# Altium PCB ProPrj_HTXStudio_OneHanded_Keyboard(1).PcbDoc (part 1 of 11)
Units mm, origin at the board's own origin, x right, y up, seen from the top; angles counter-clockwise.
Board outline 152.4 x 101.6 mm, 20 copper layers (F.Cu, F.Mask, B.Cu, B.Mask, In1.Cu, F.SilkS, In2.Cu, B.SilkS, F.Adhes, B.Adhes, F.Paste, B.Paste, Dwgs.User, Cmts.User, Eco1.User, Eco2.User, Edge.Cuts, Margin, B.CrtYd, F.CrtYd); 269 components, 0 nets, 747 pads, 1168 vias.
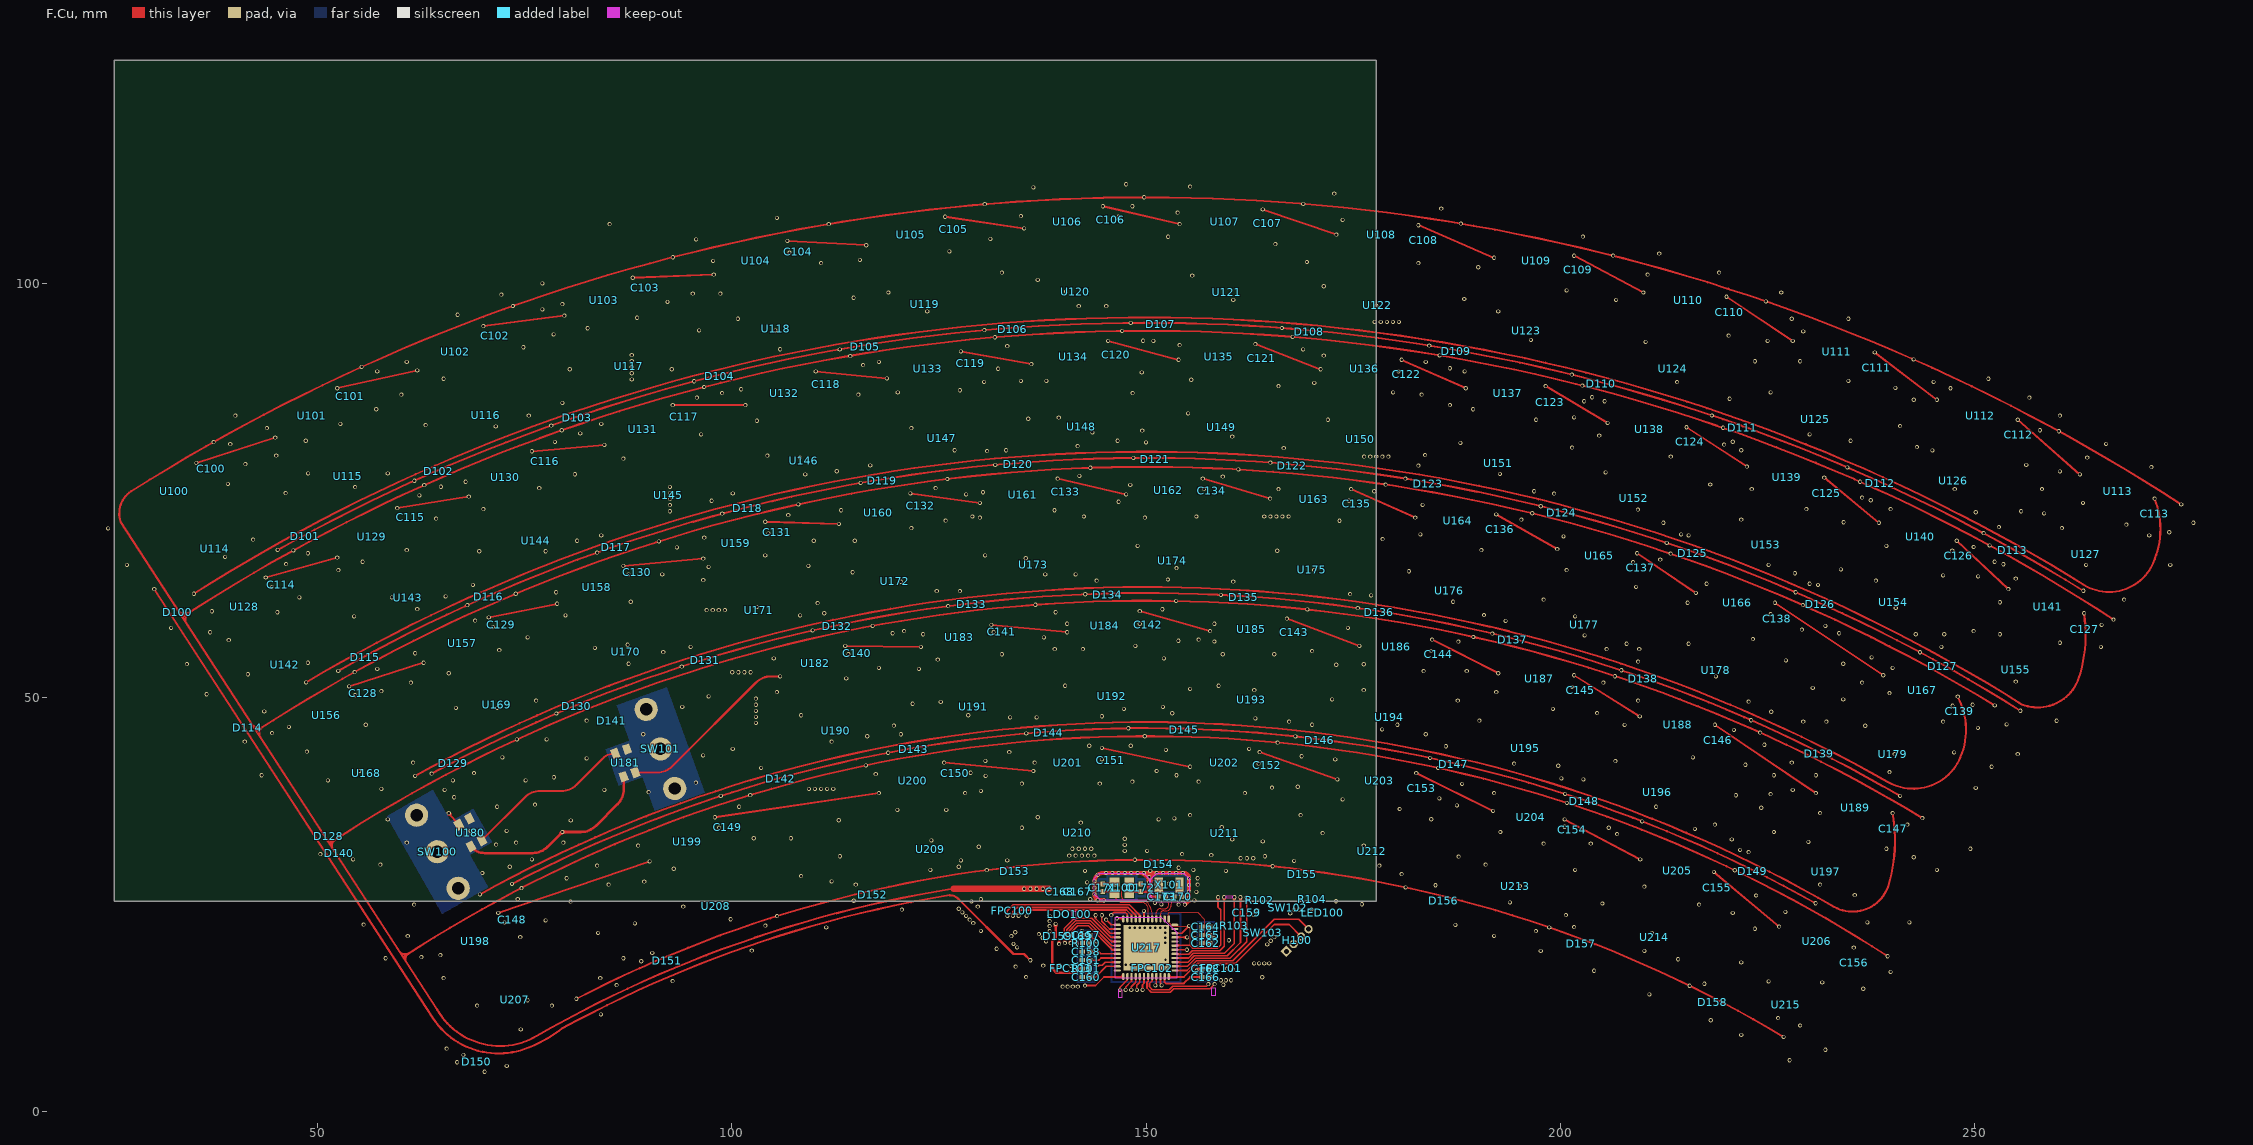
[diagram p0: F.Cu view]
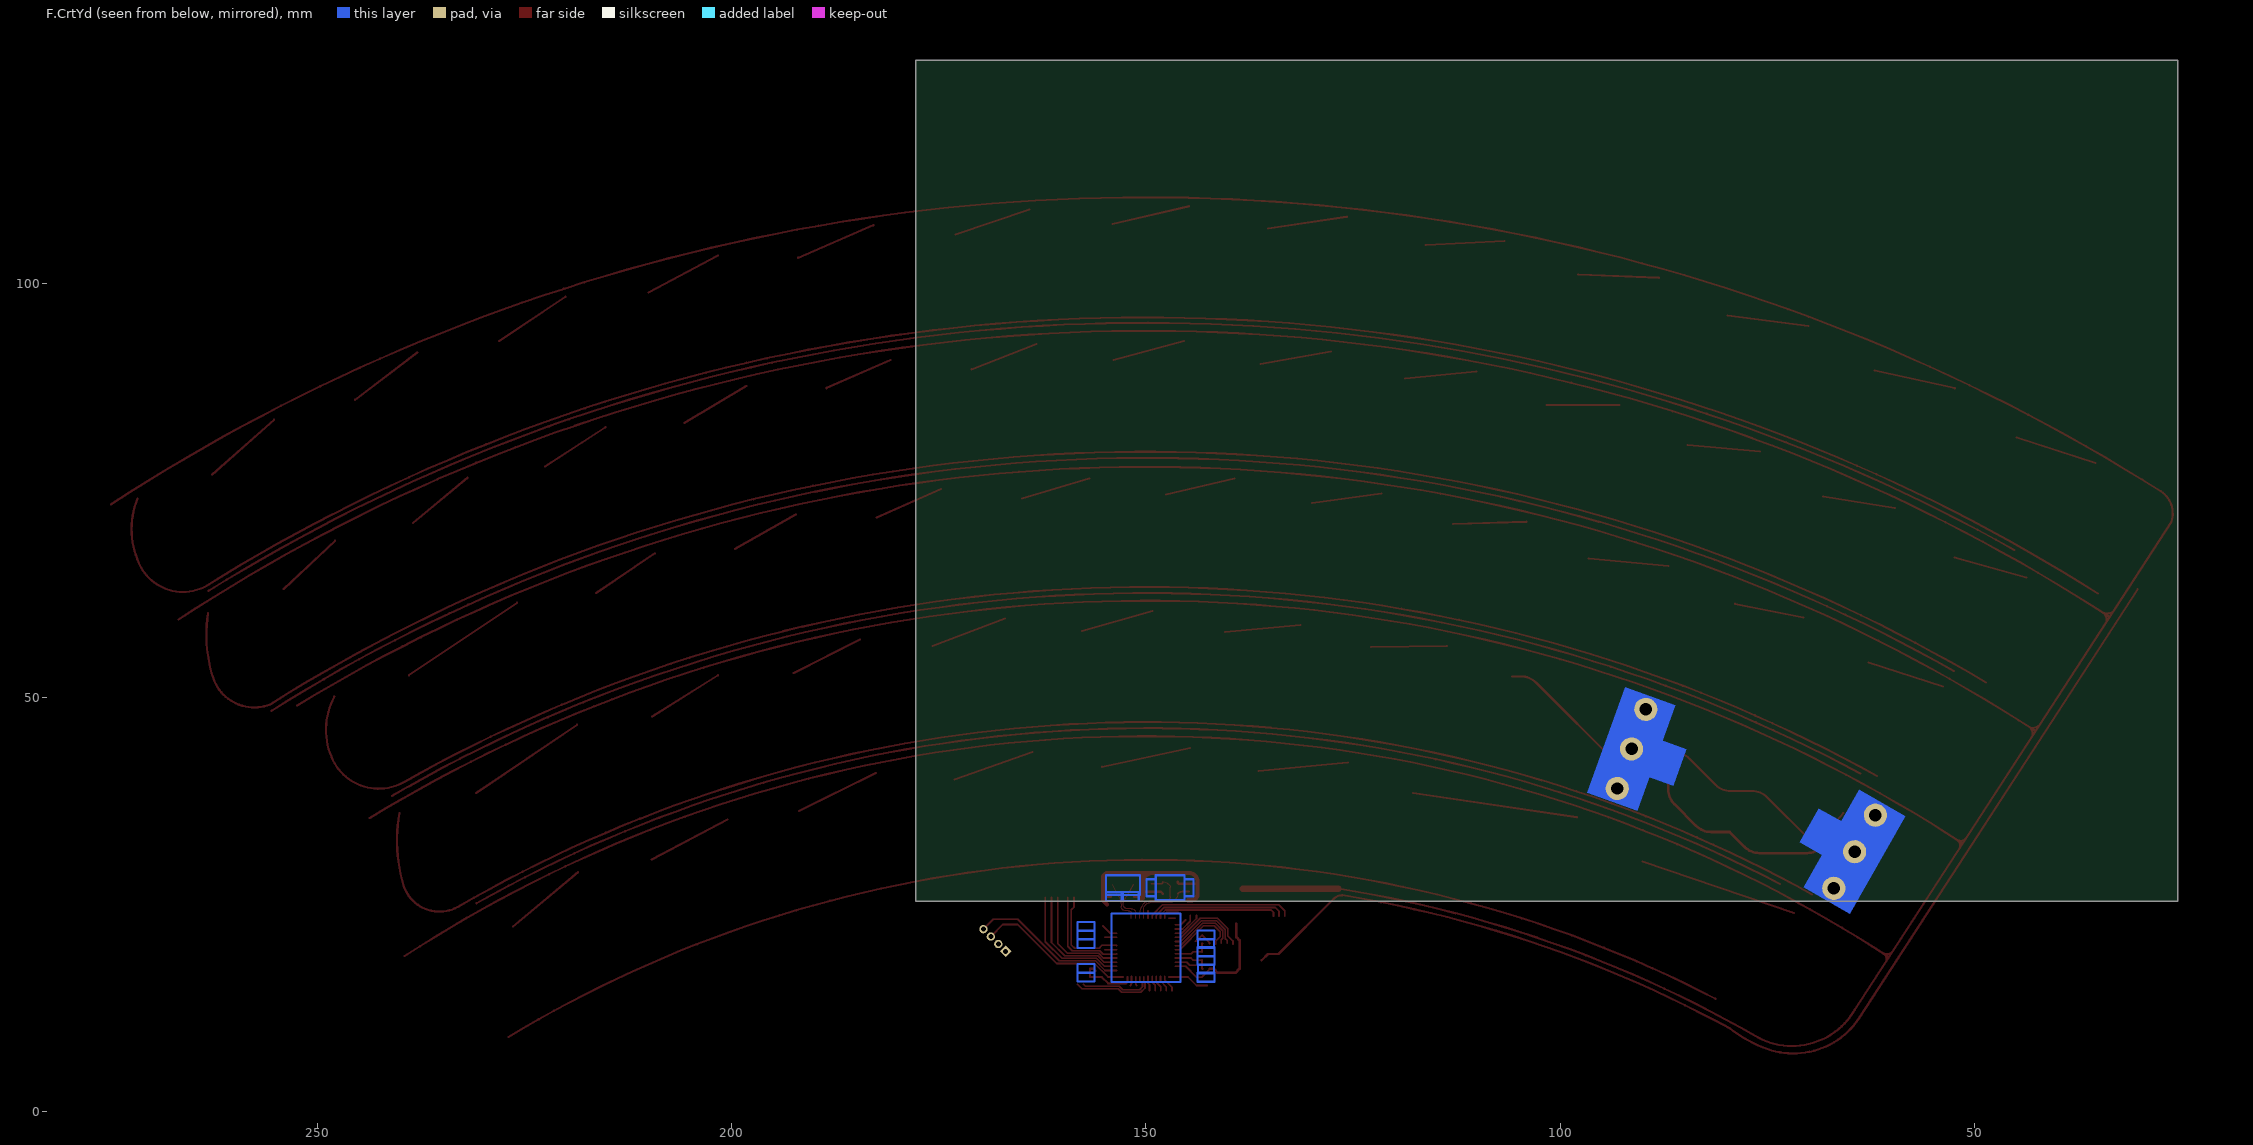
[diagram p1: F.CrtYd view, seen from below]
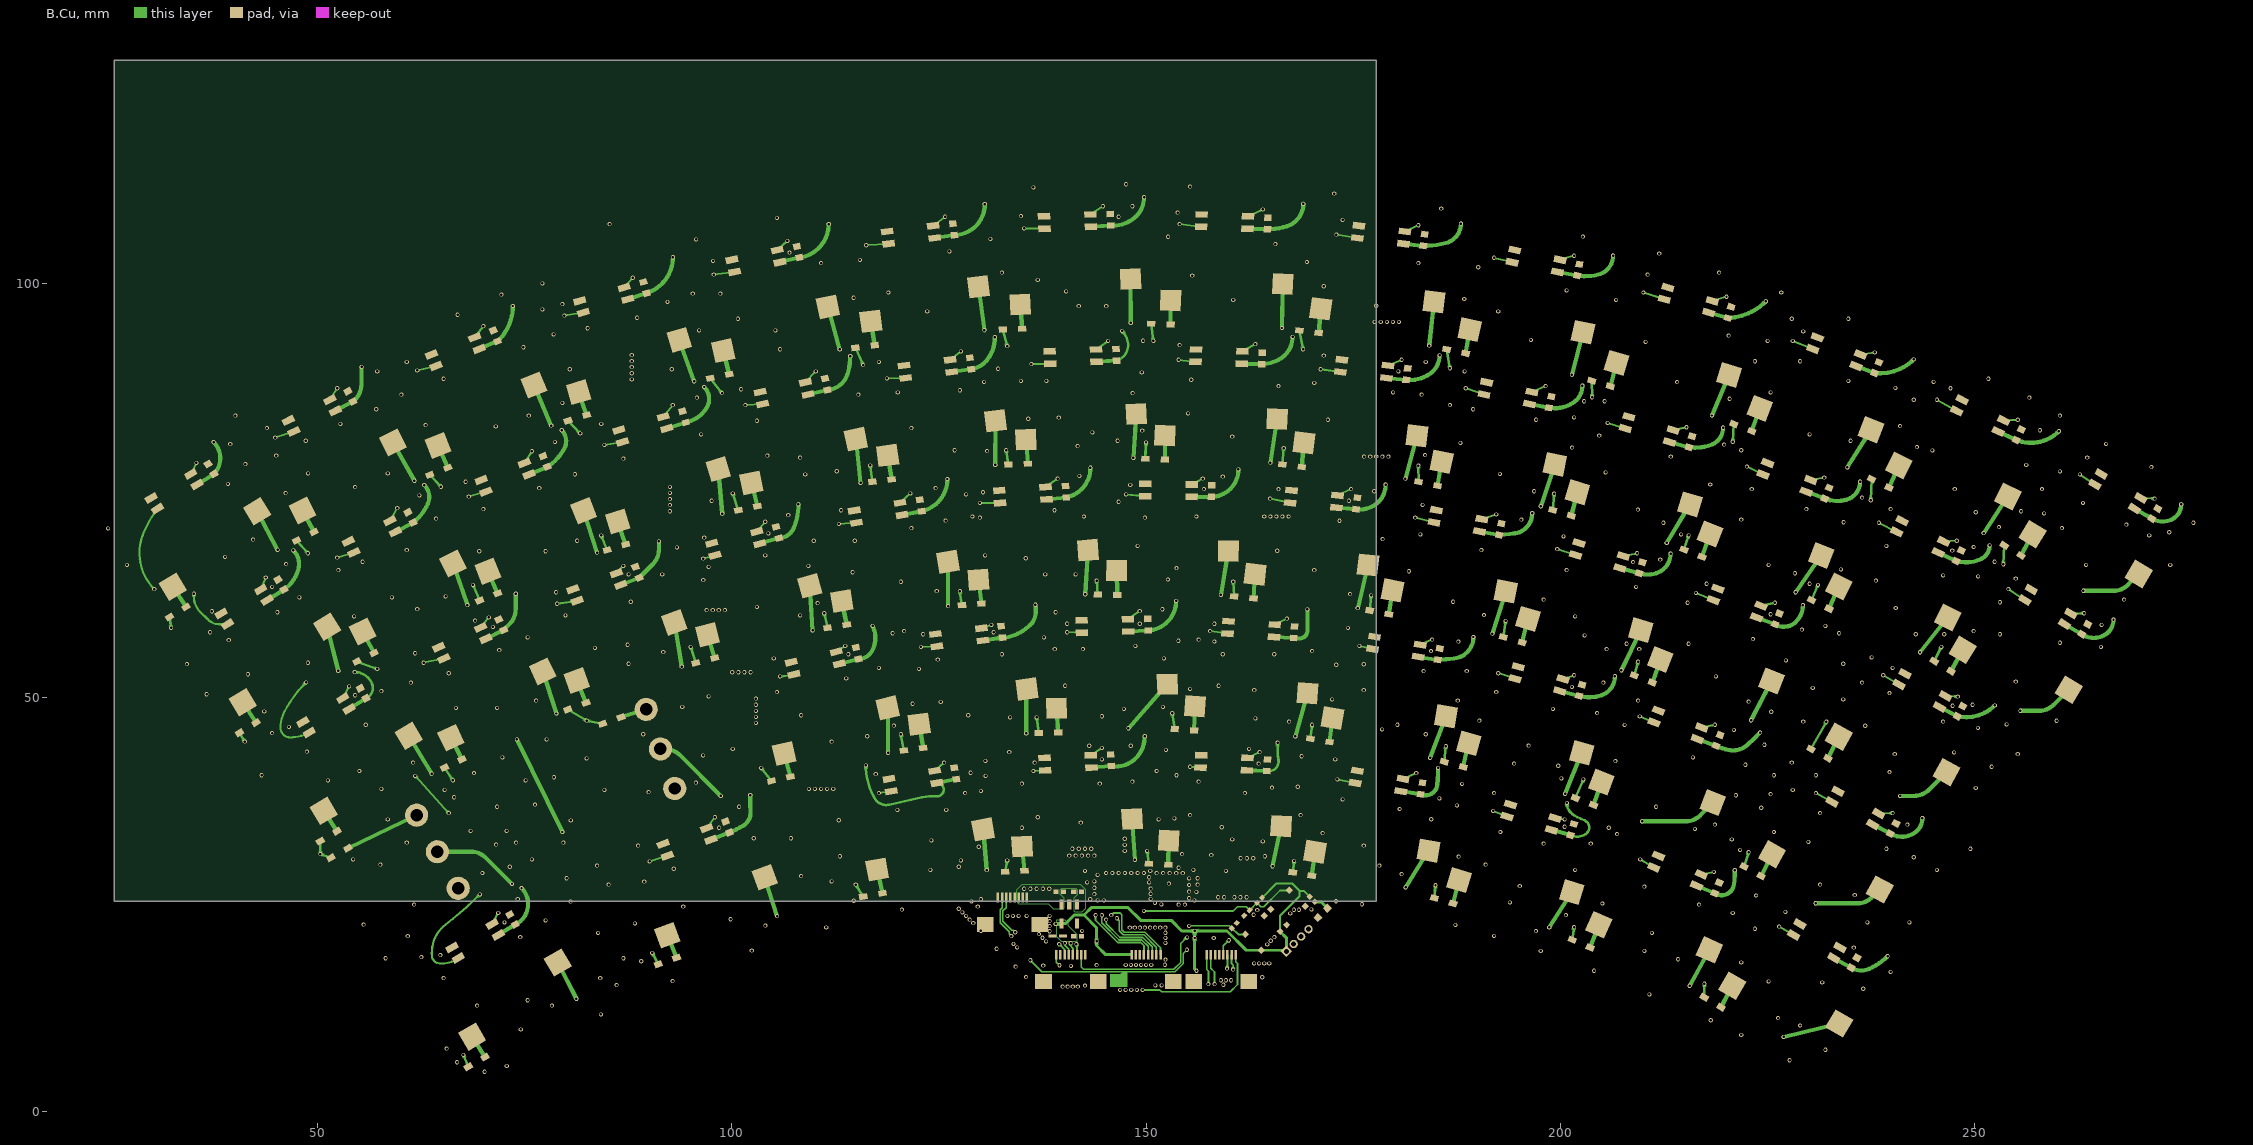
[diagram p2: B.Cu]
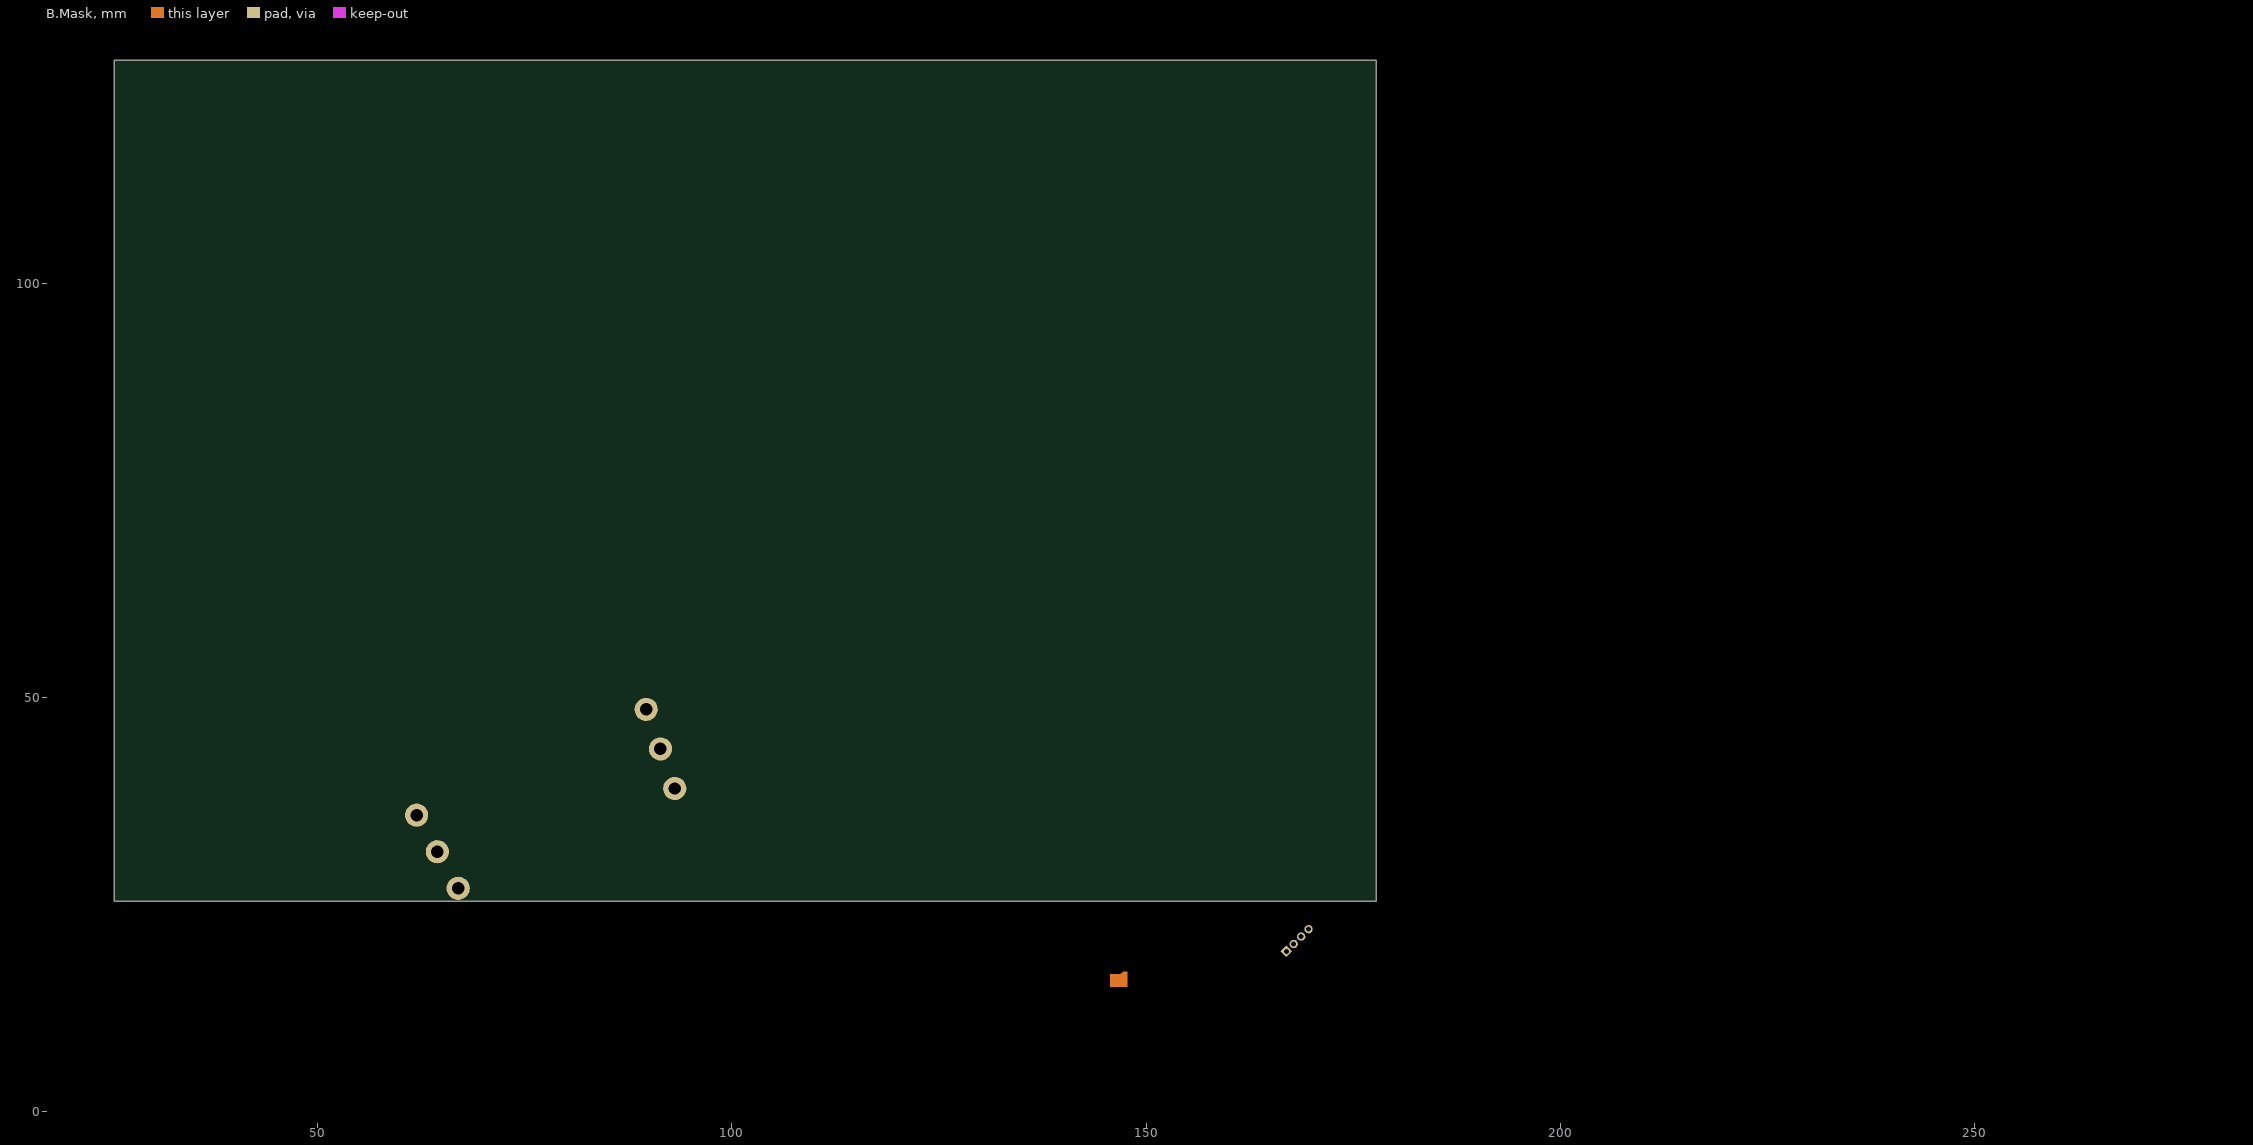
[diagram p3: B.Mask]
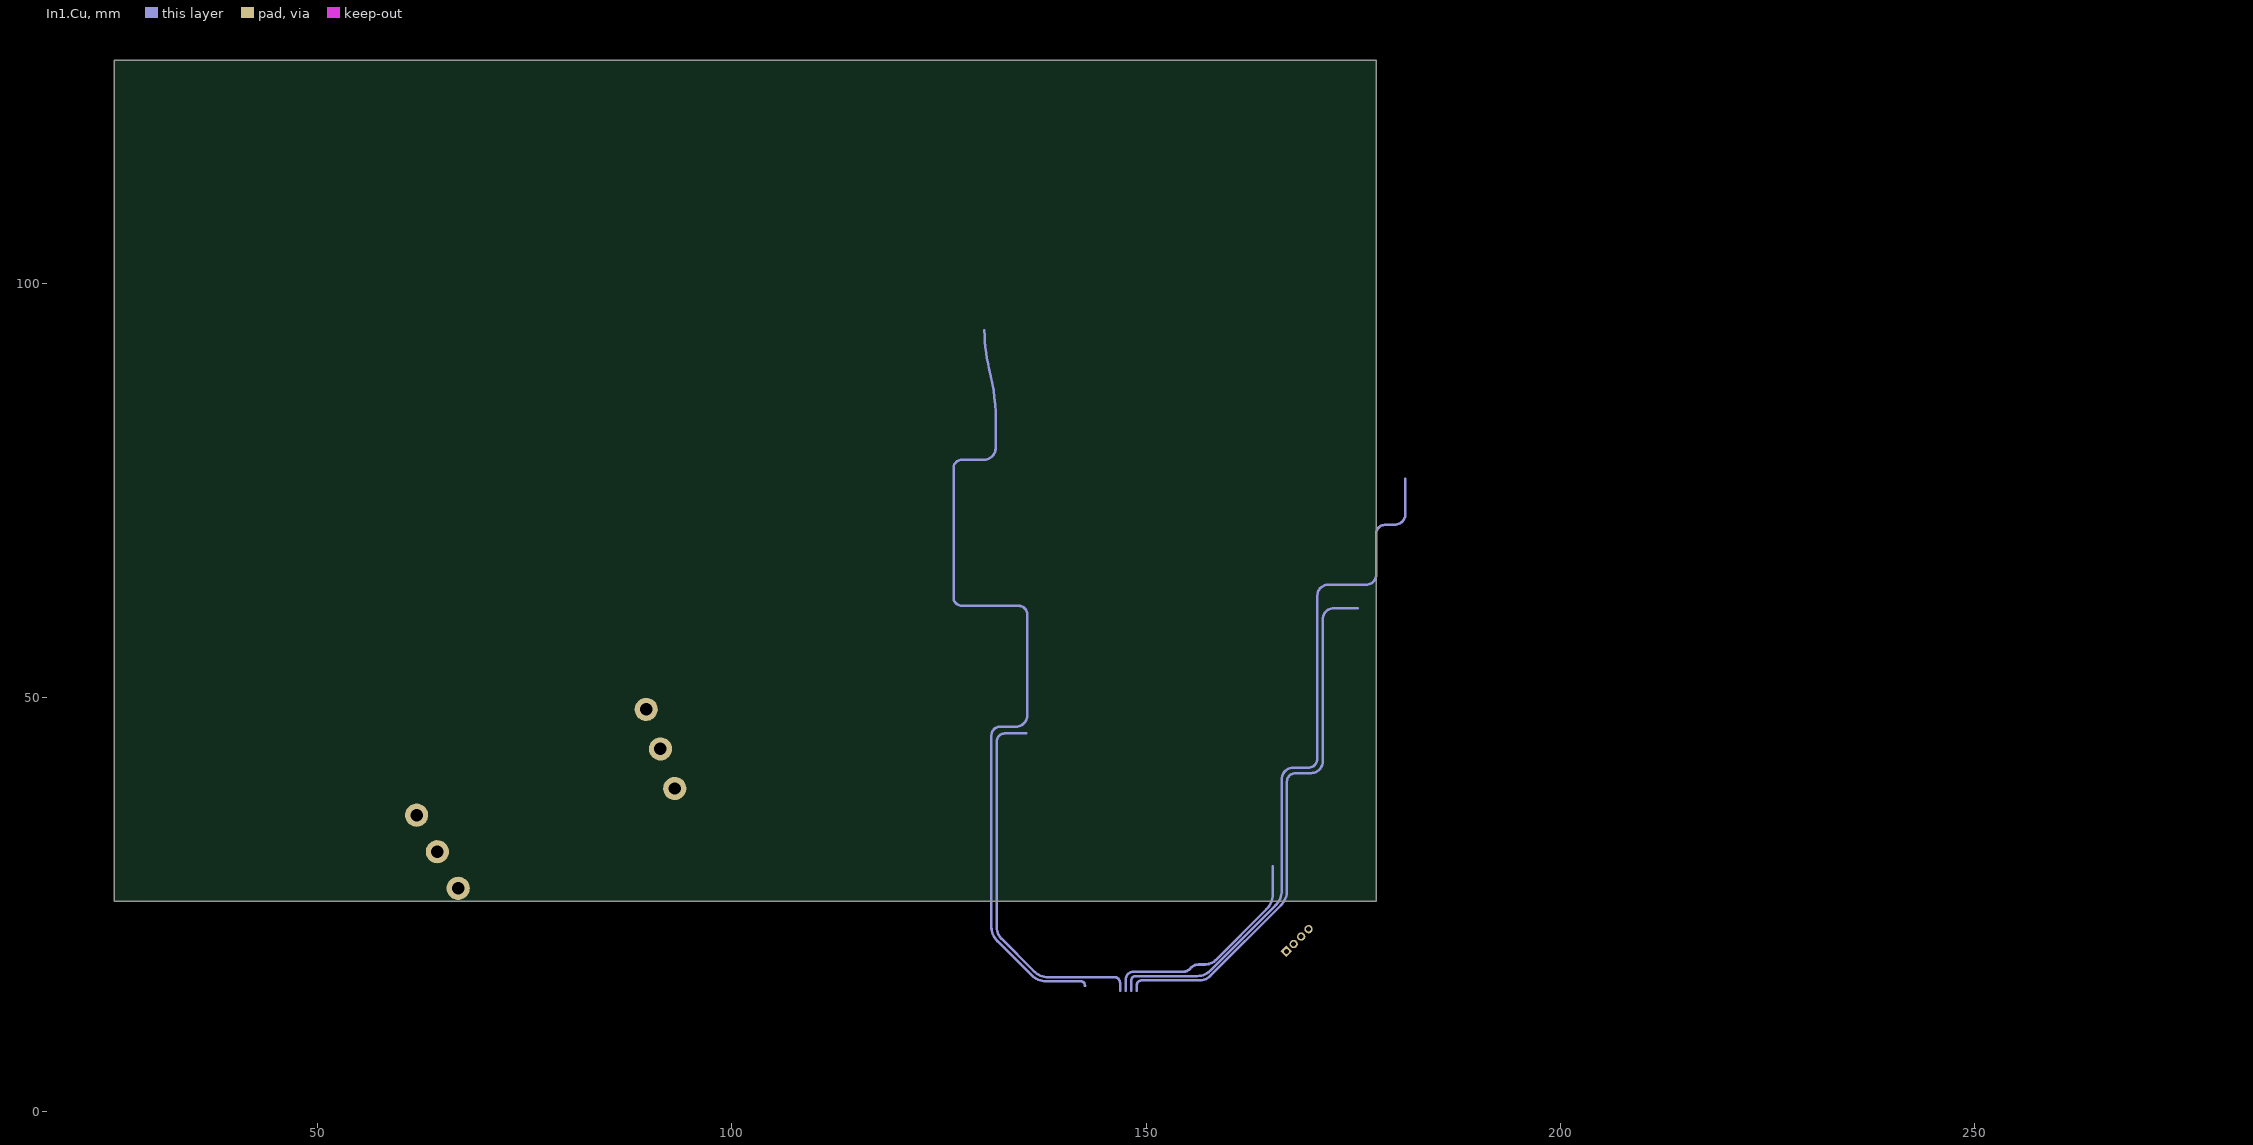
[diagram p4: In1.Cu]
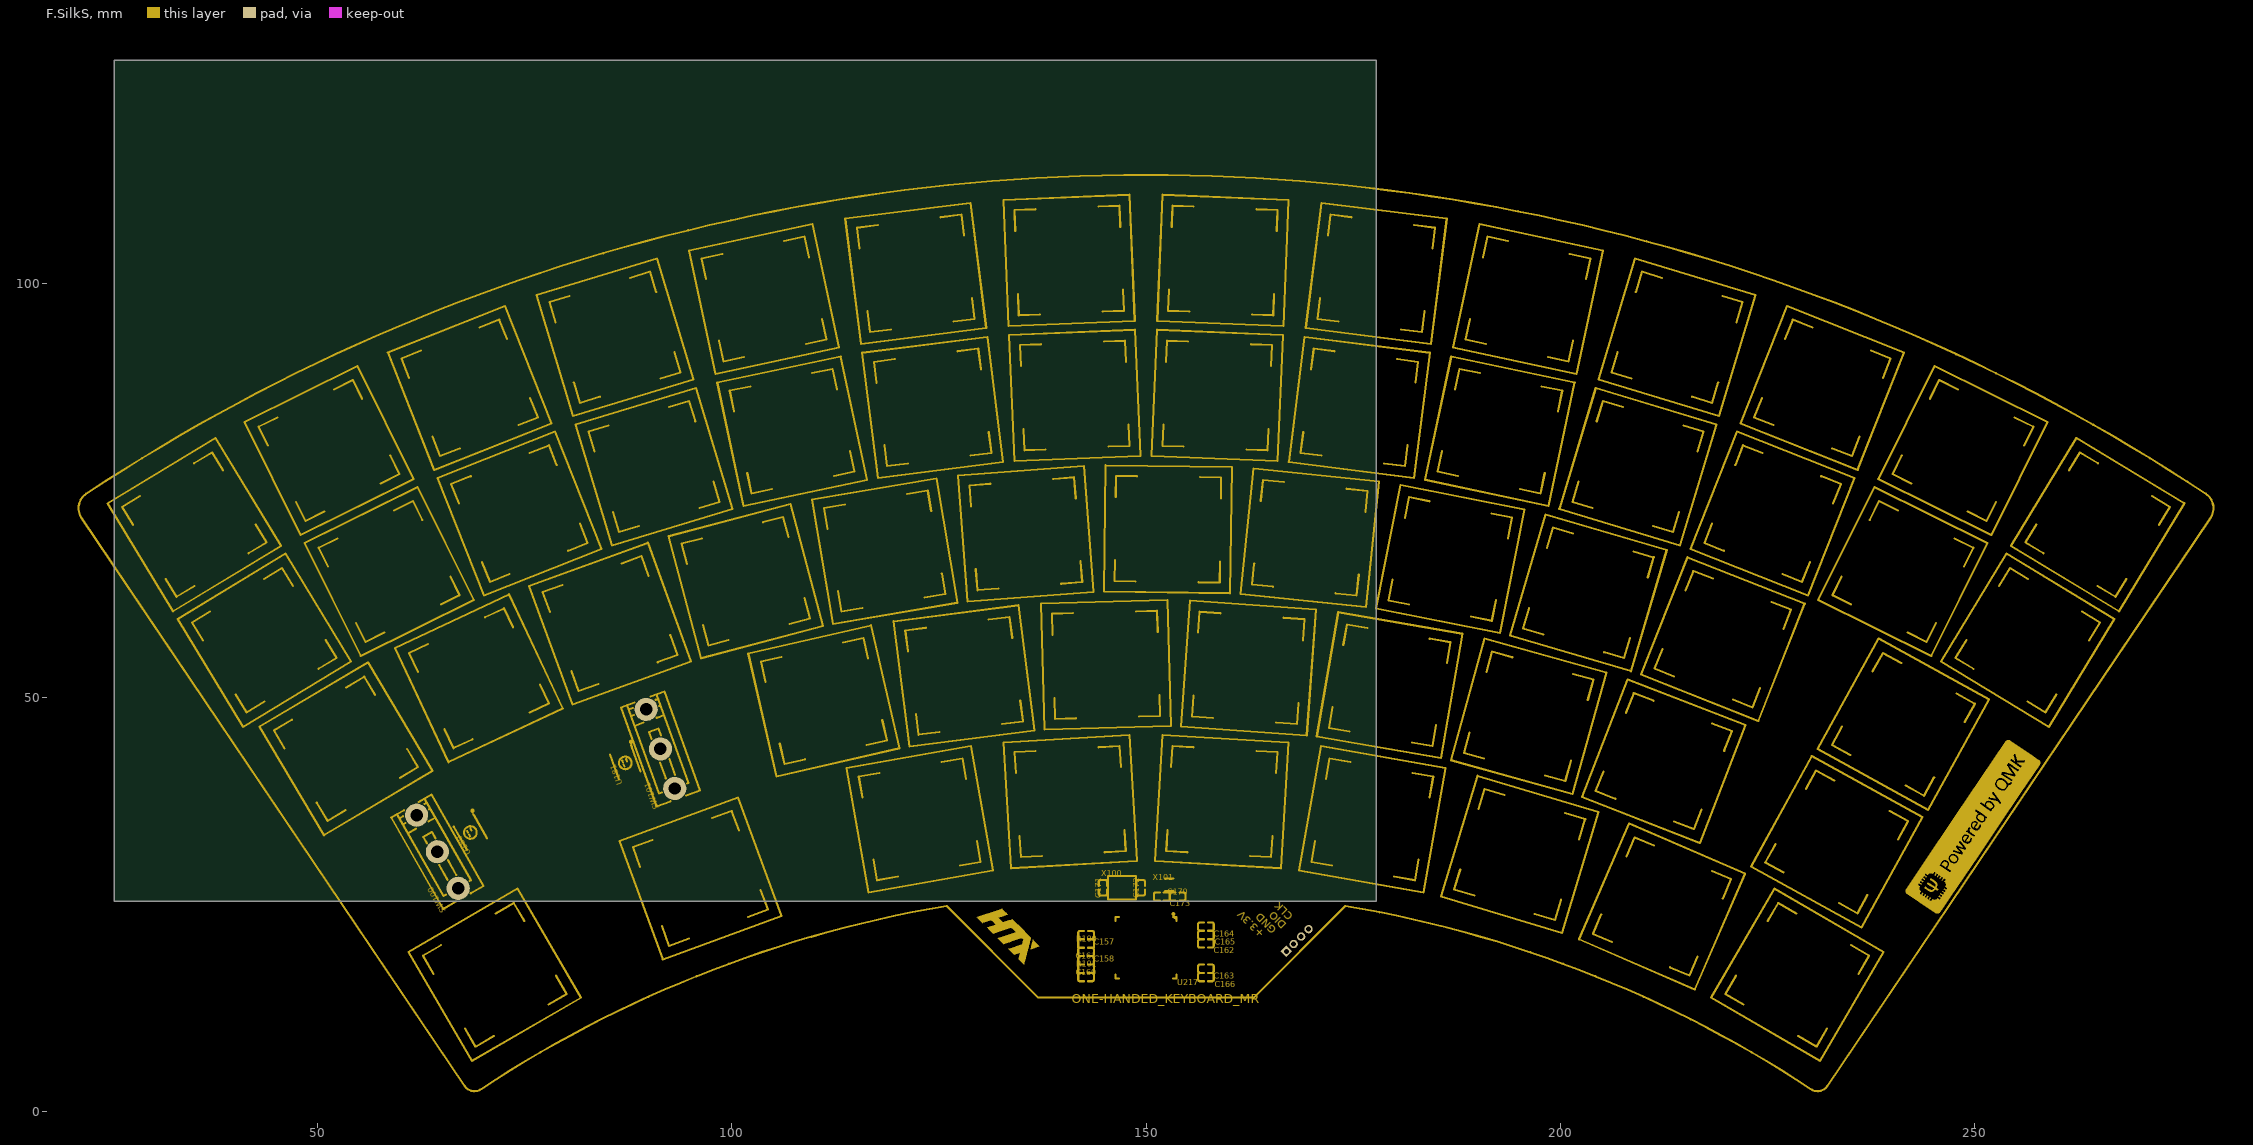
[diagram p5: F.SilkS]
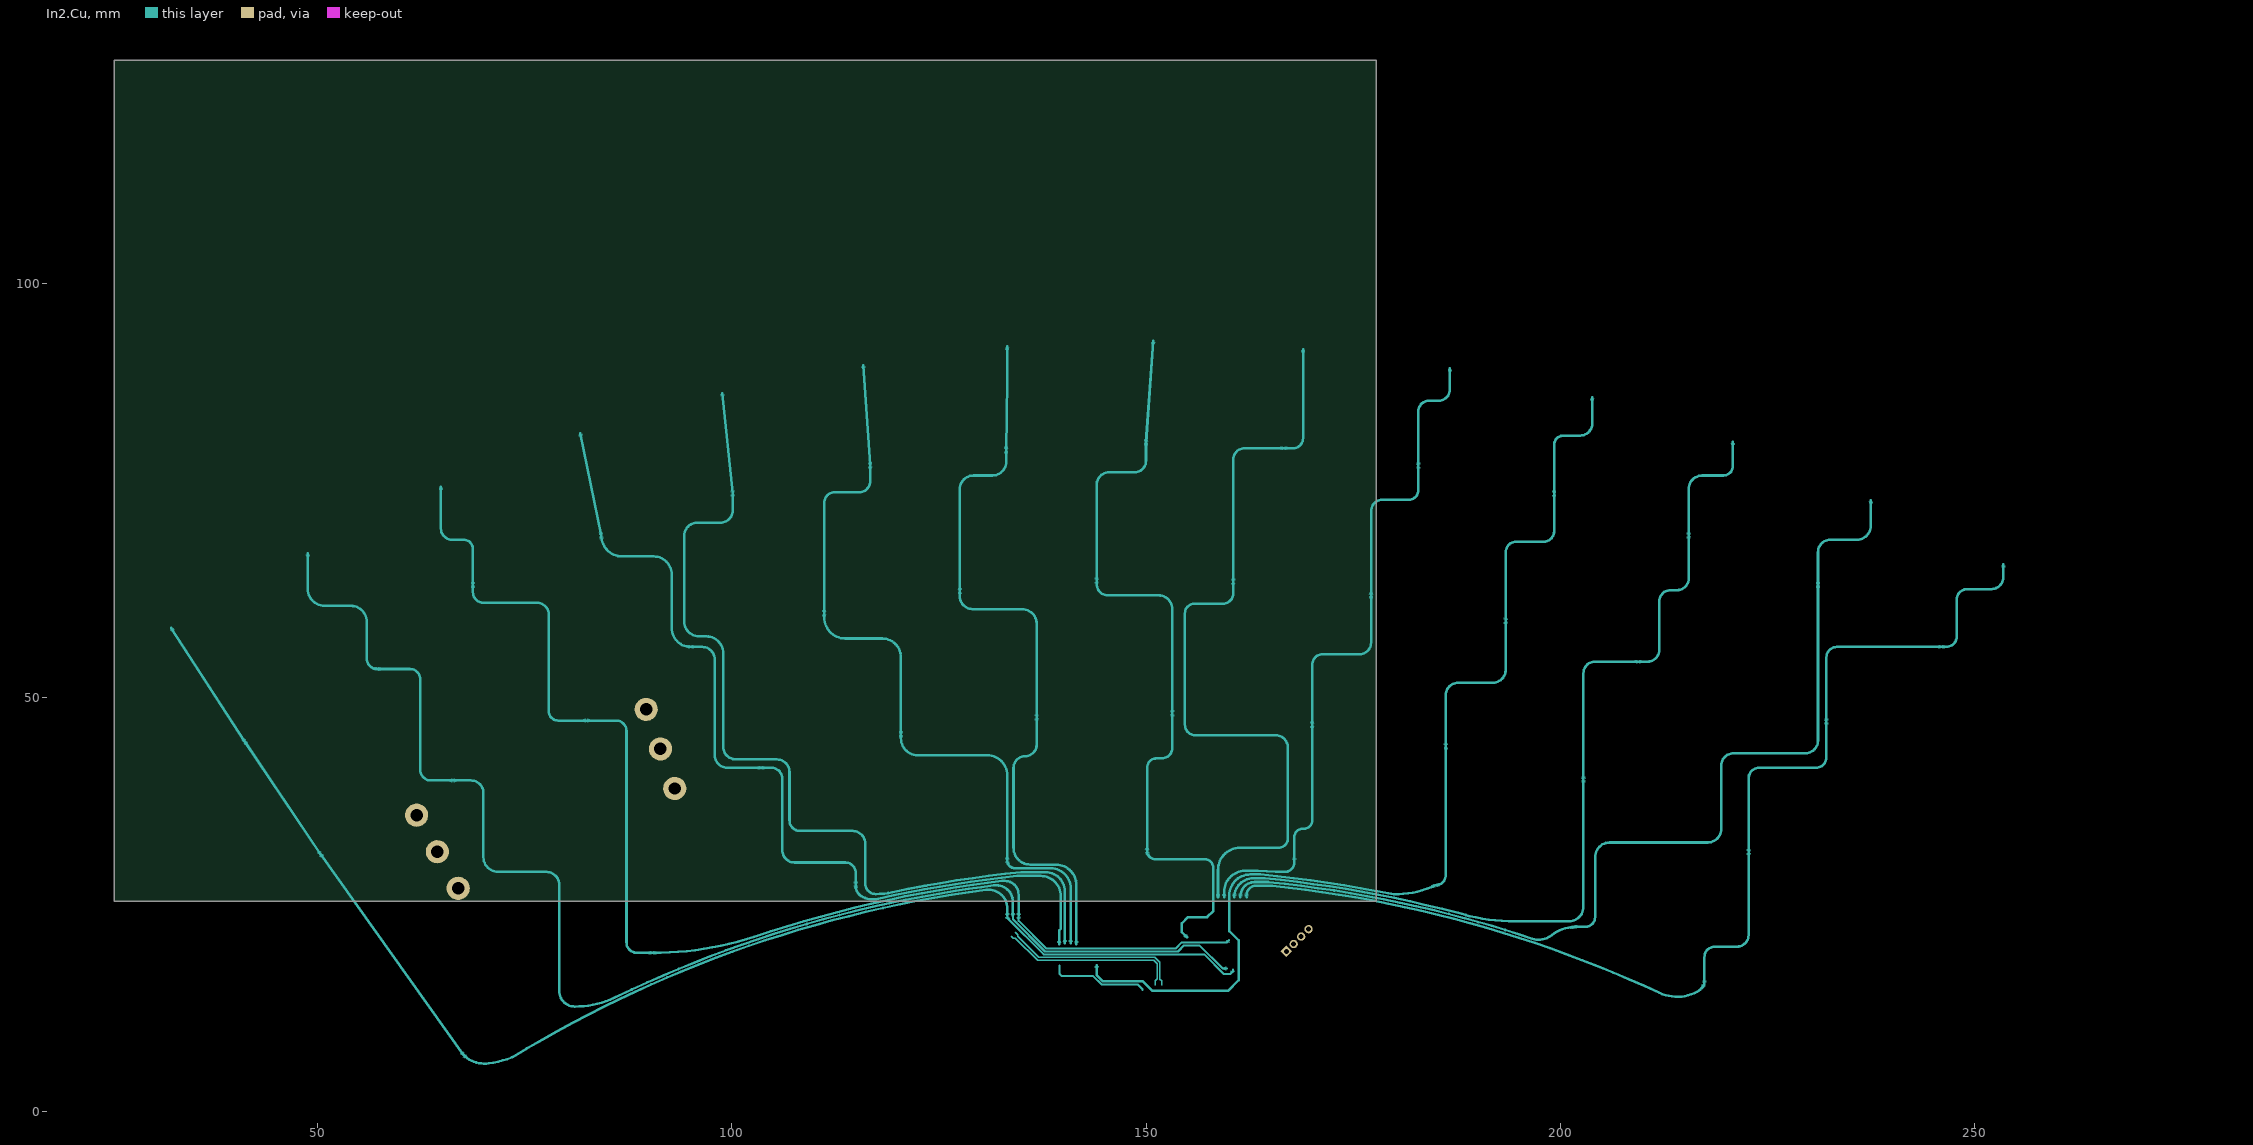
[diagram p6: In2.Cu]
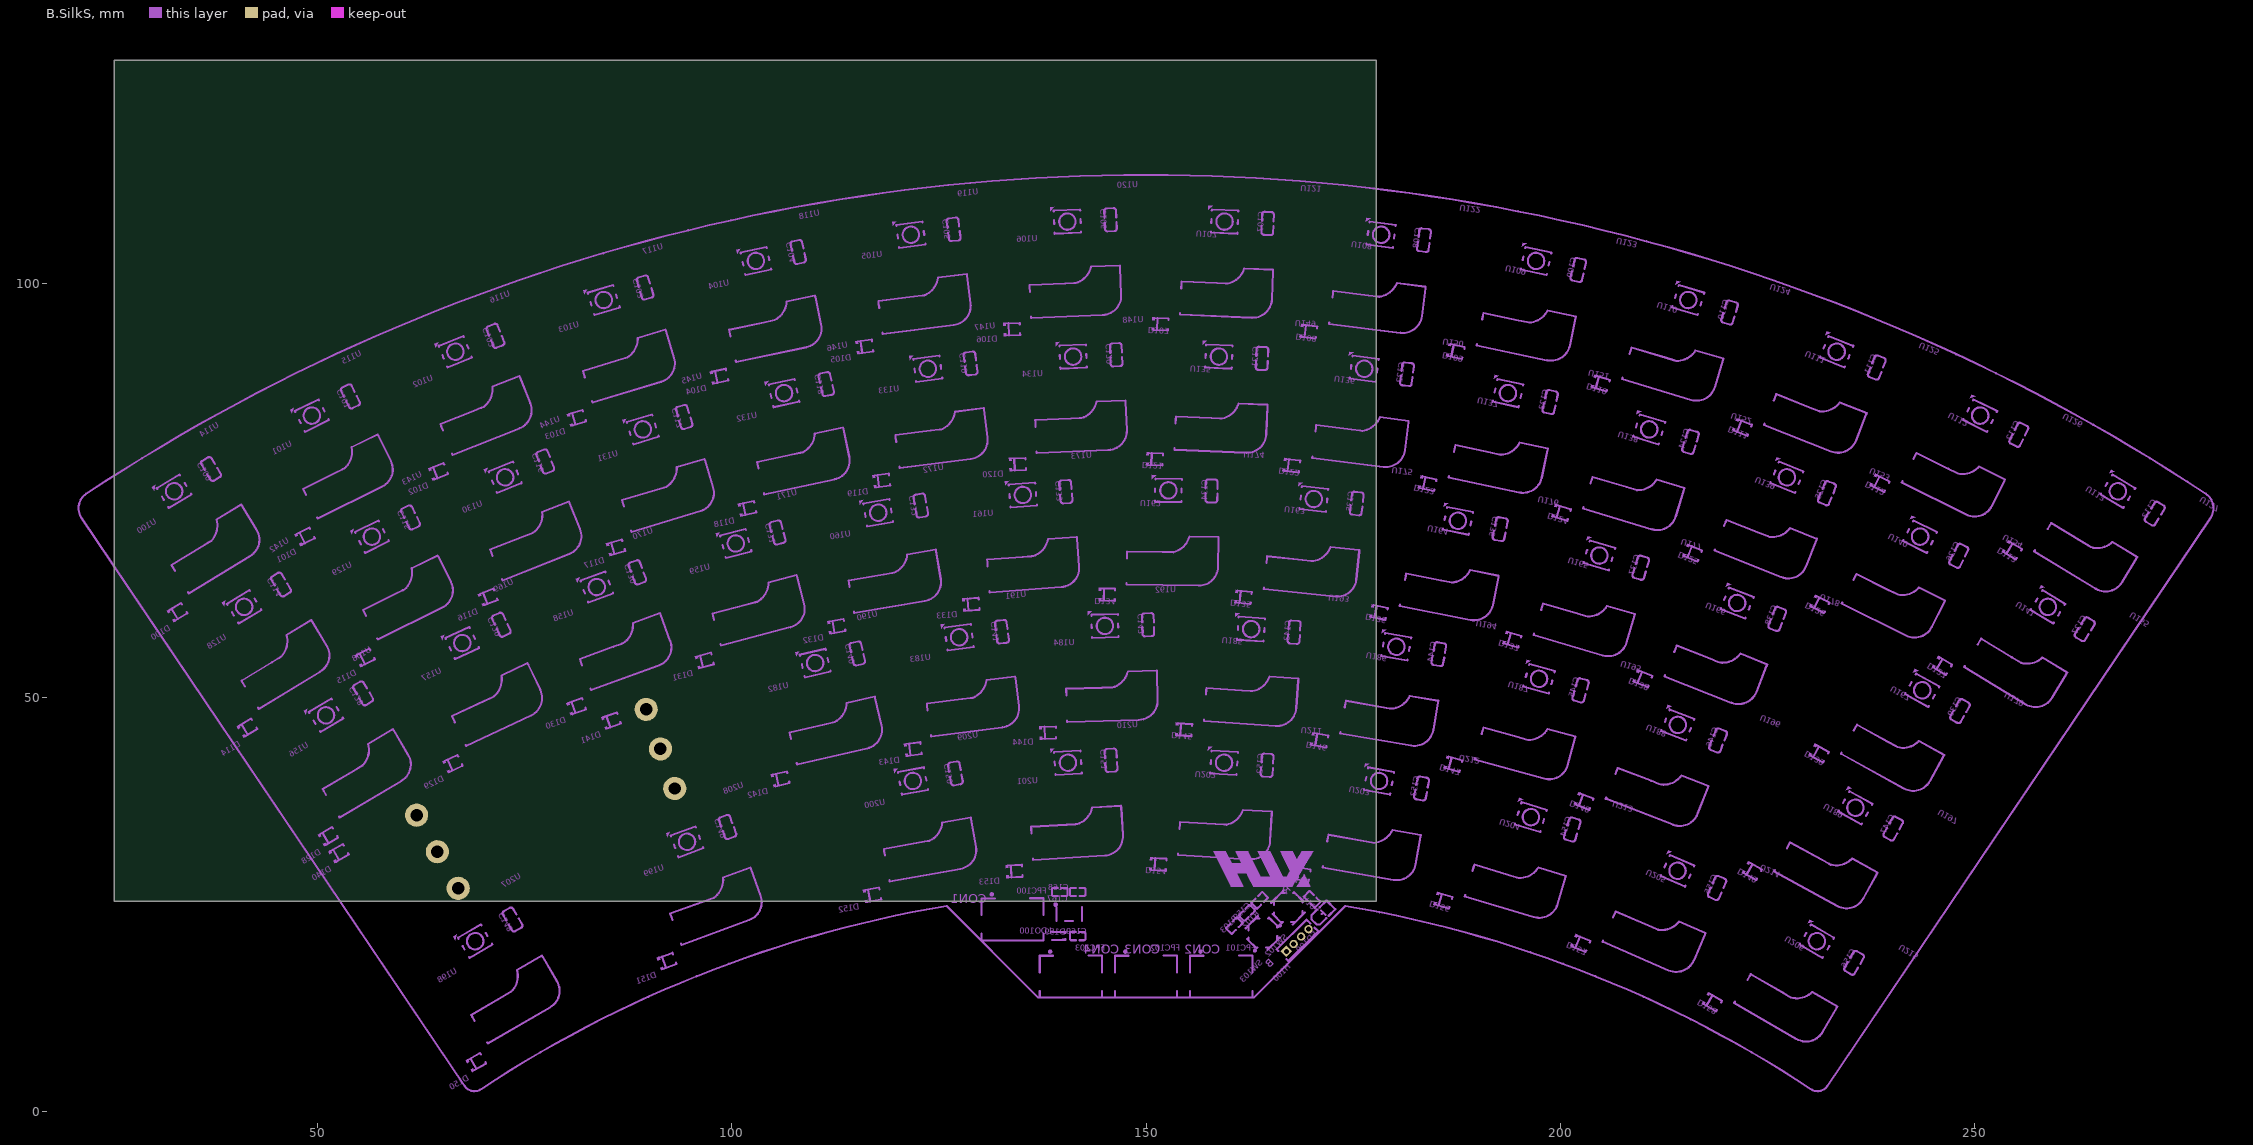
[diagram p7: B.SilkS]
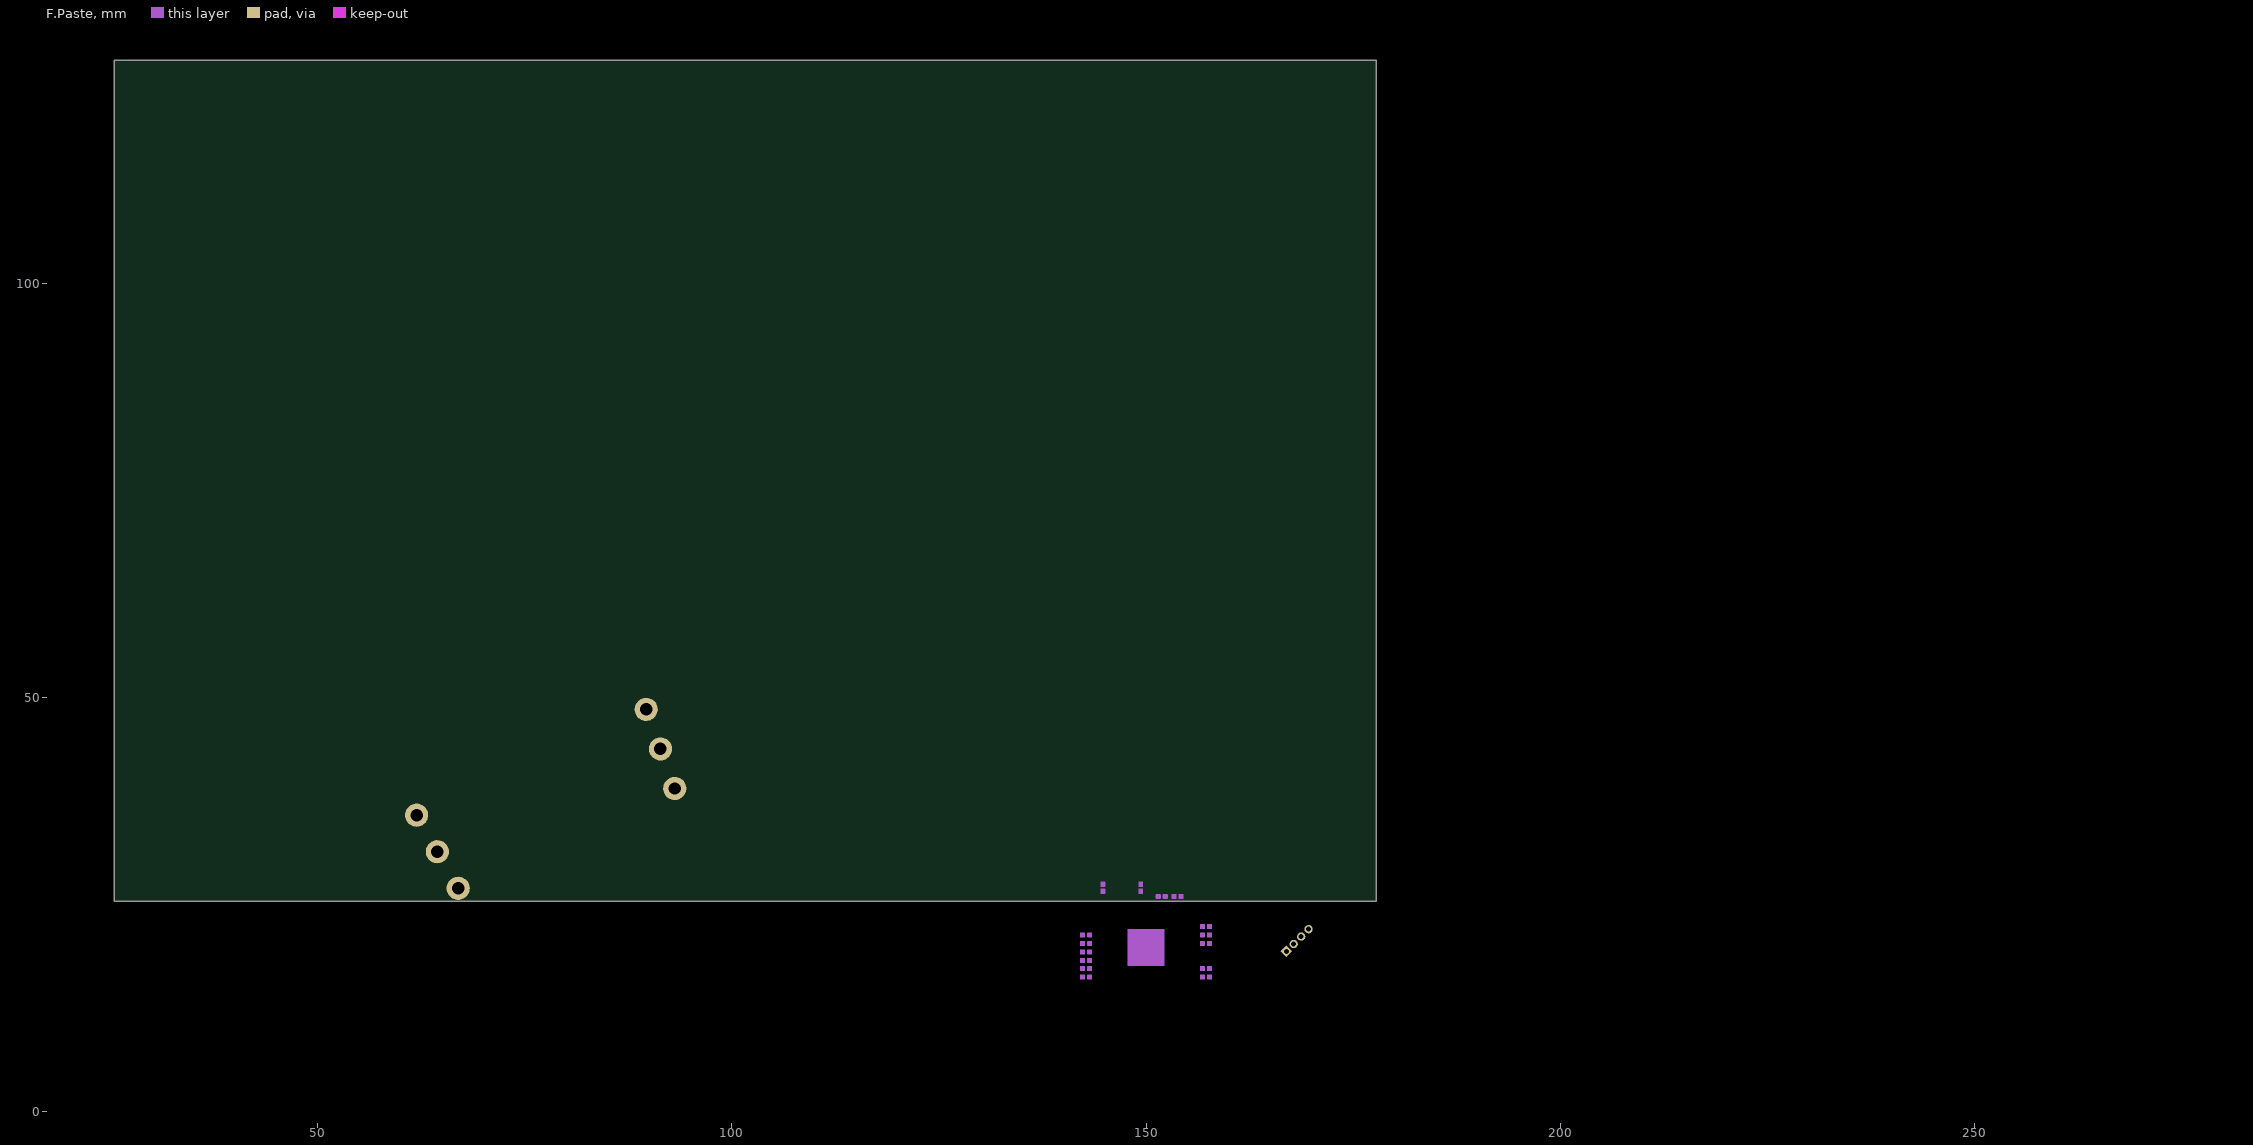
[diagram p8: F.Paste]
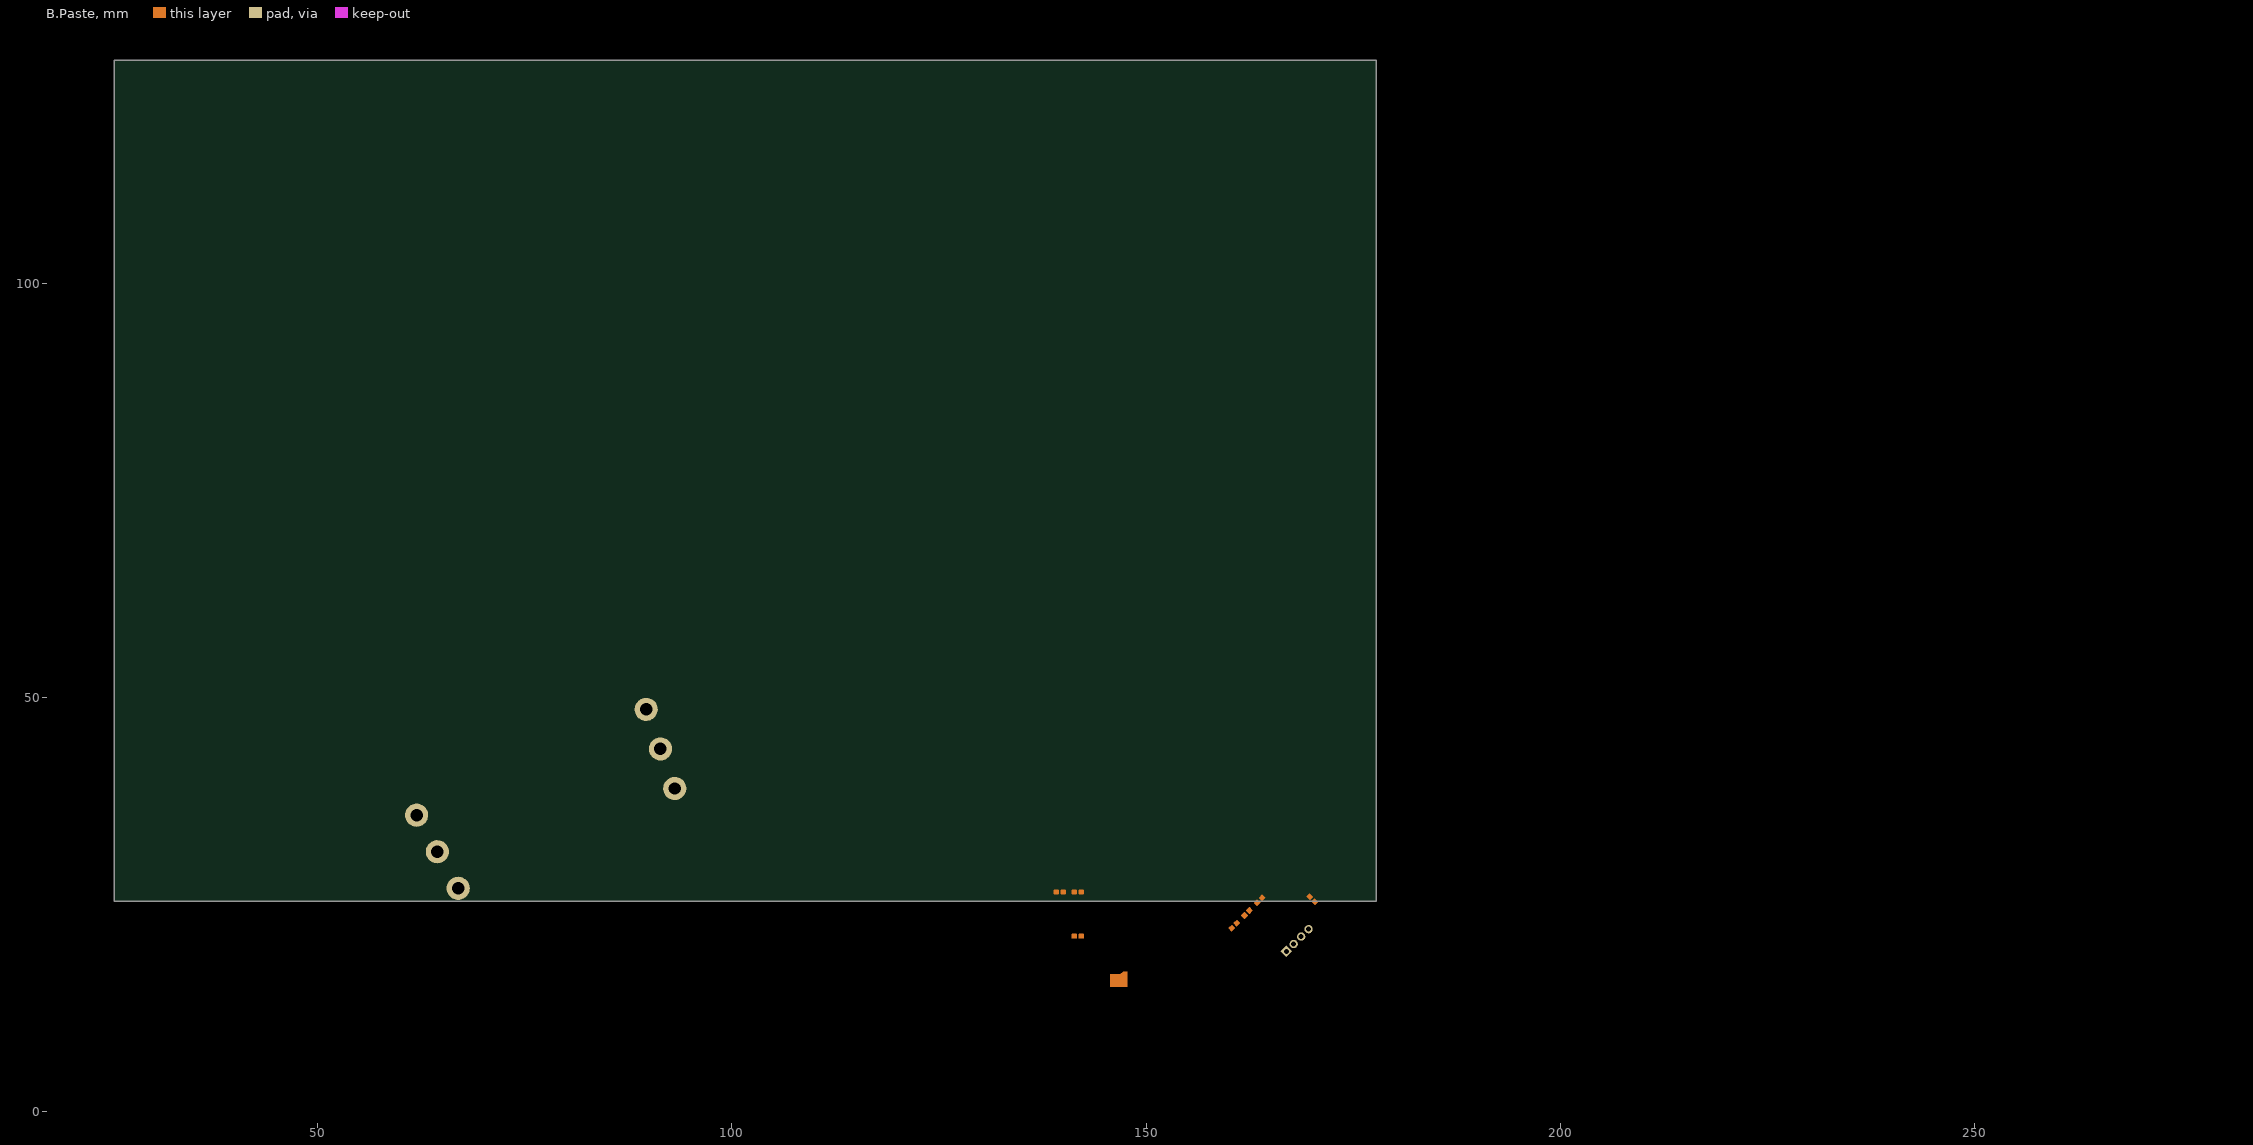
[diagram p9: B.Paste]
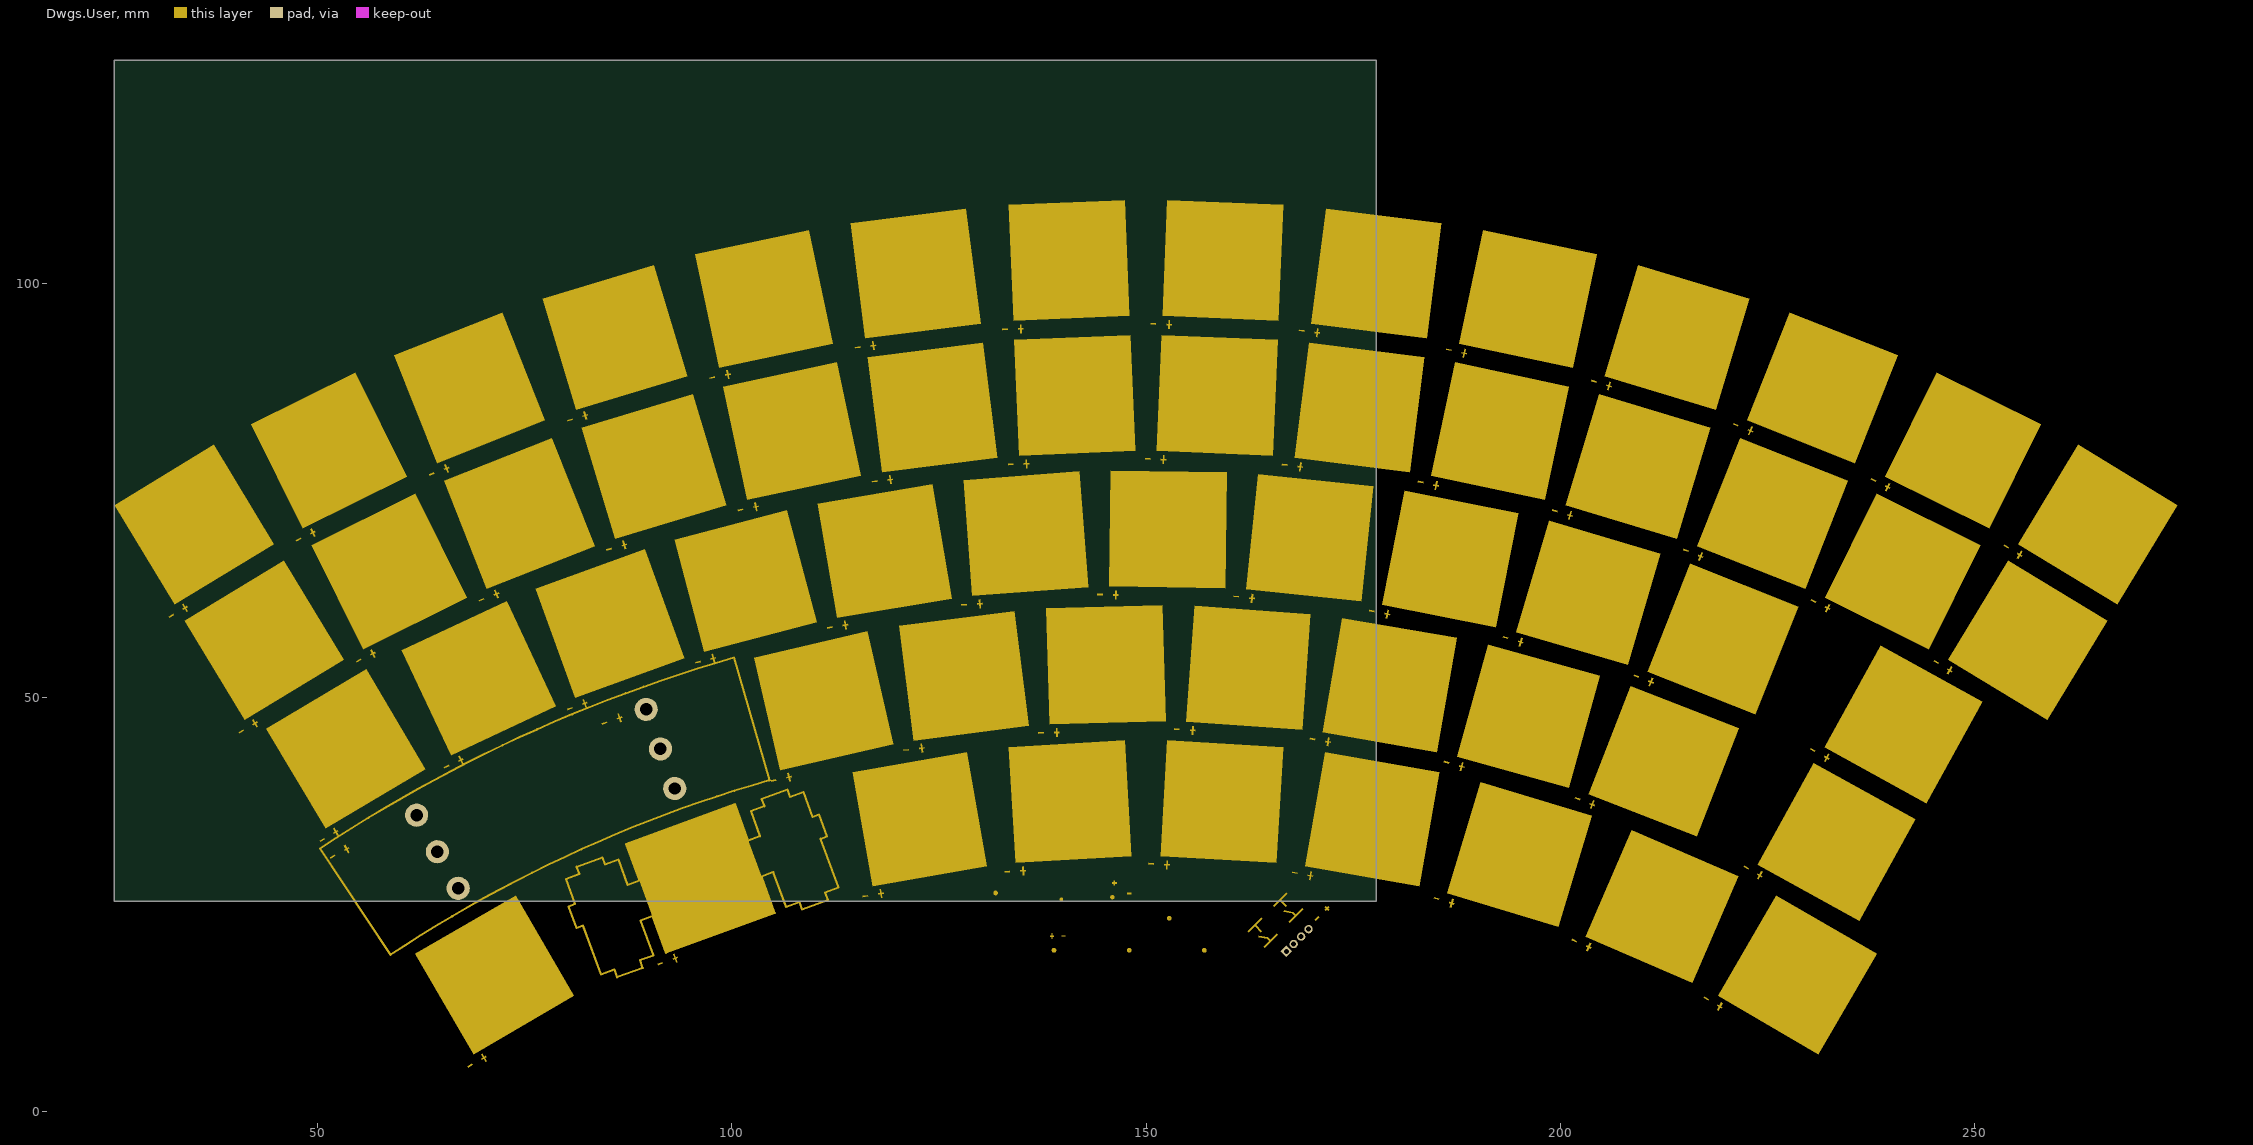
[diagram p10: Dwgs.User]
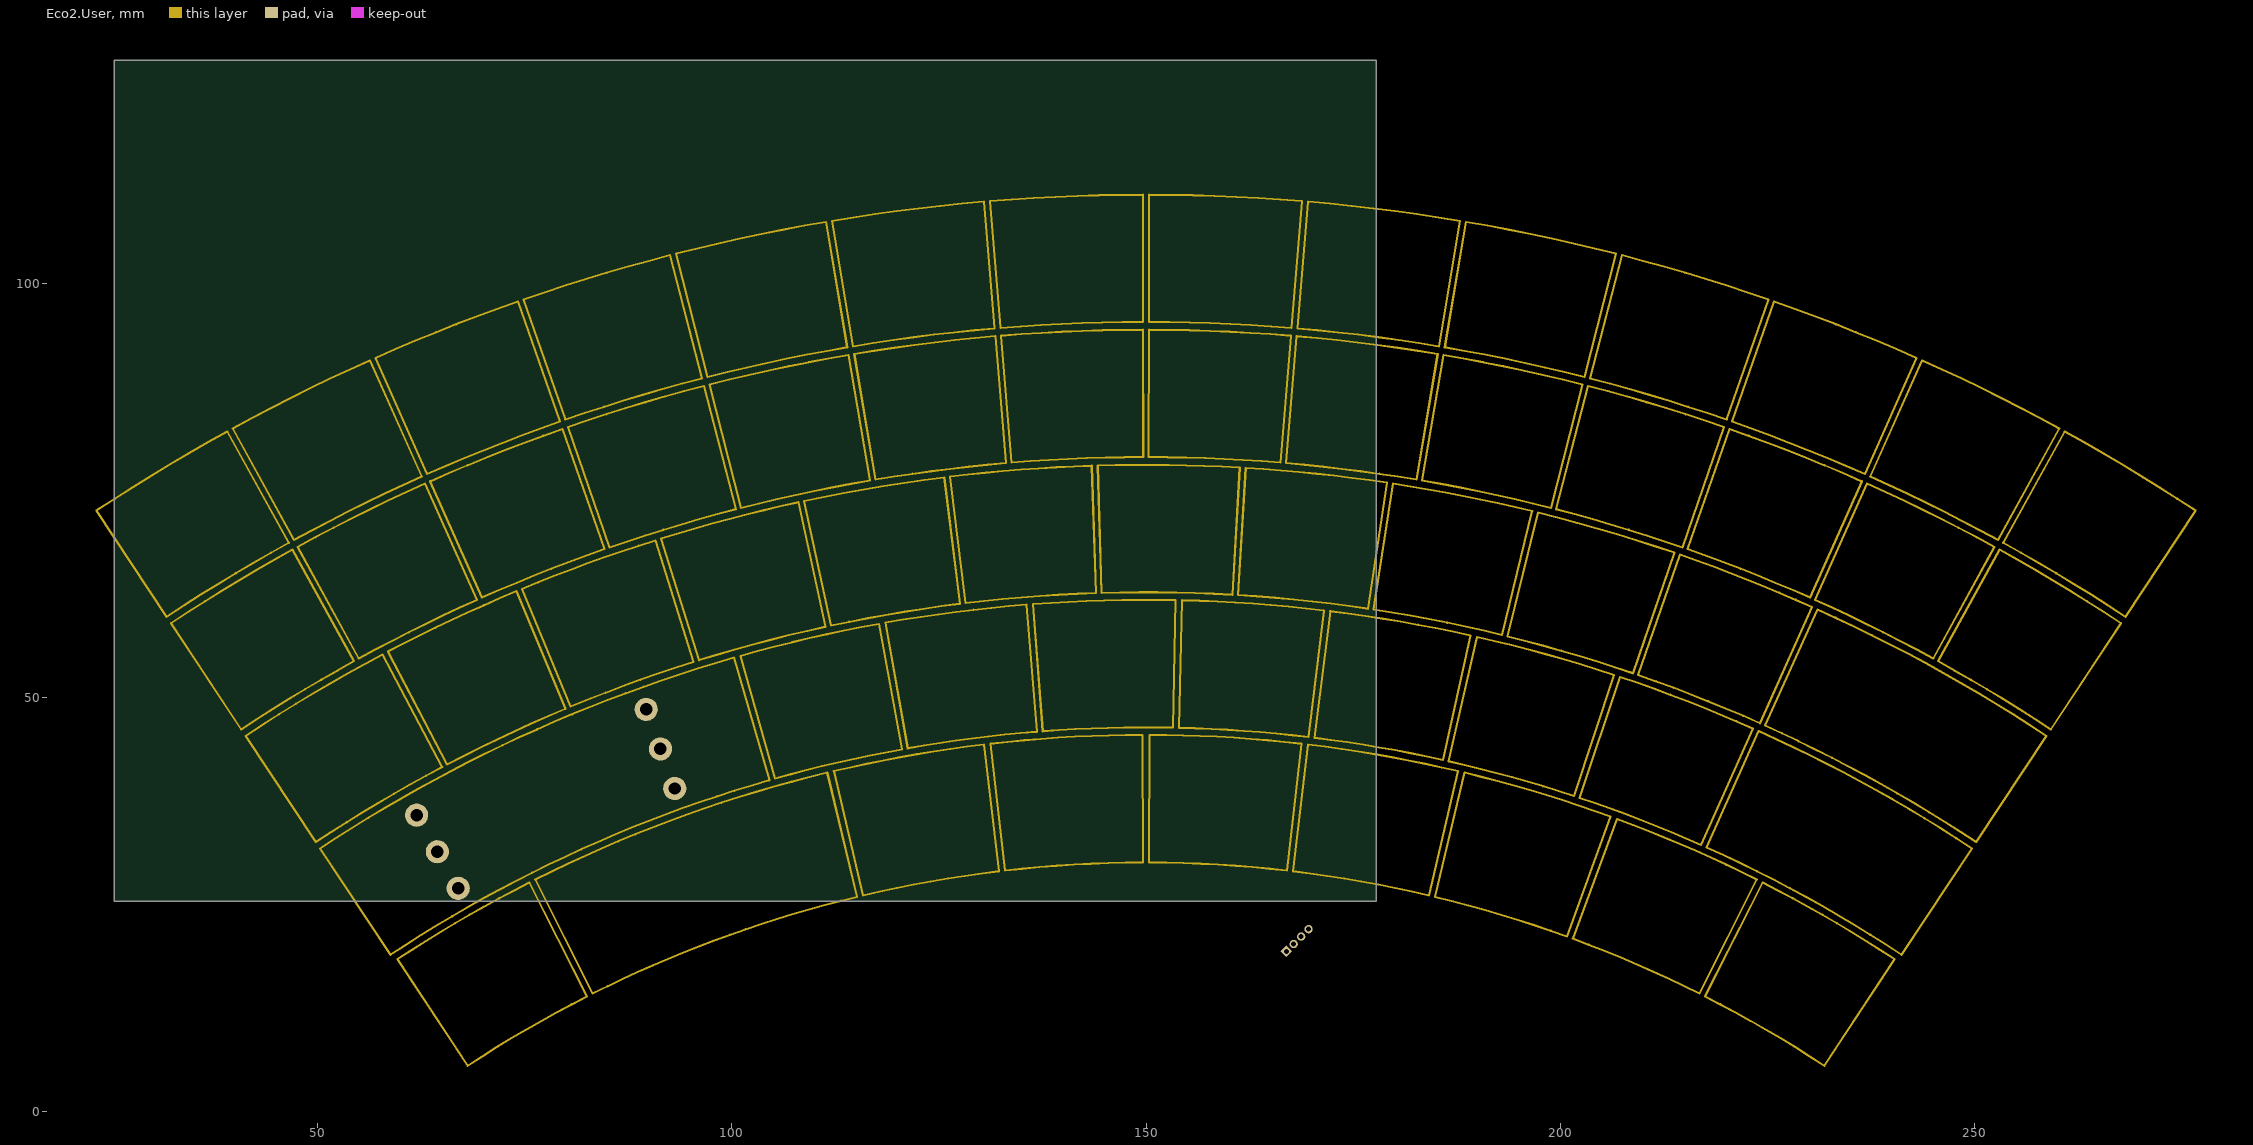
[diagram p11: Eco2.User]
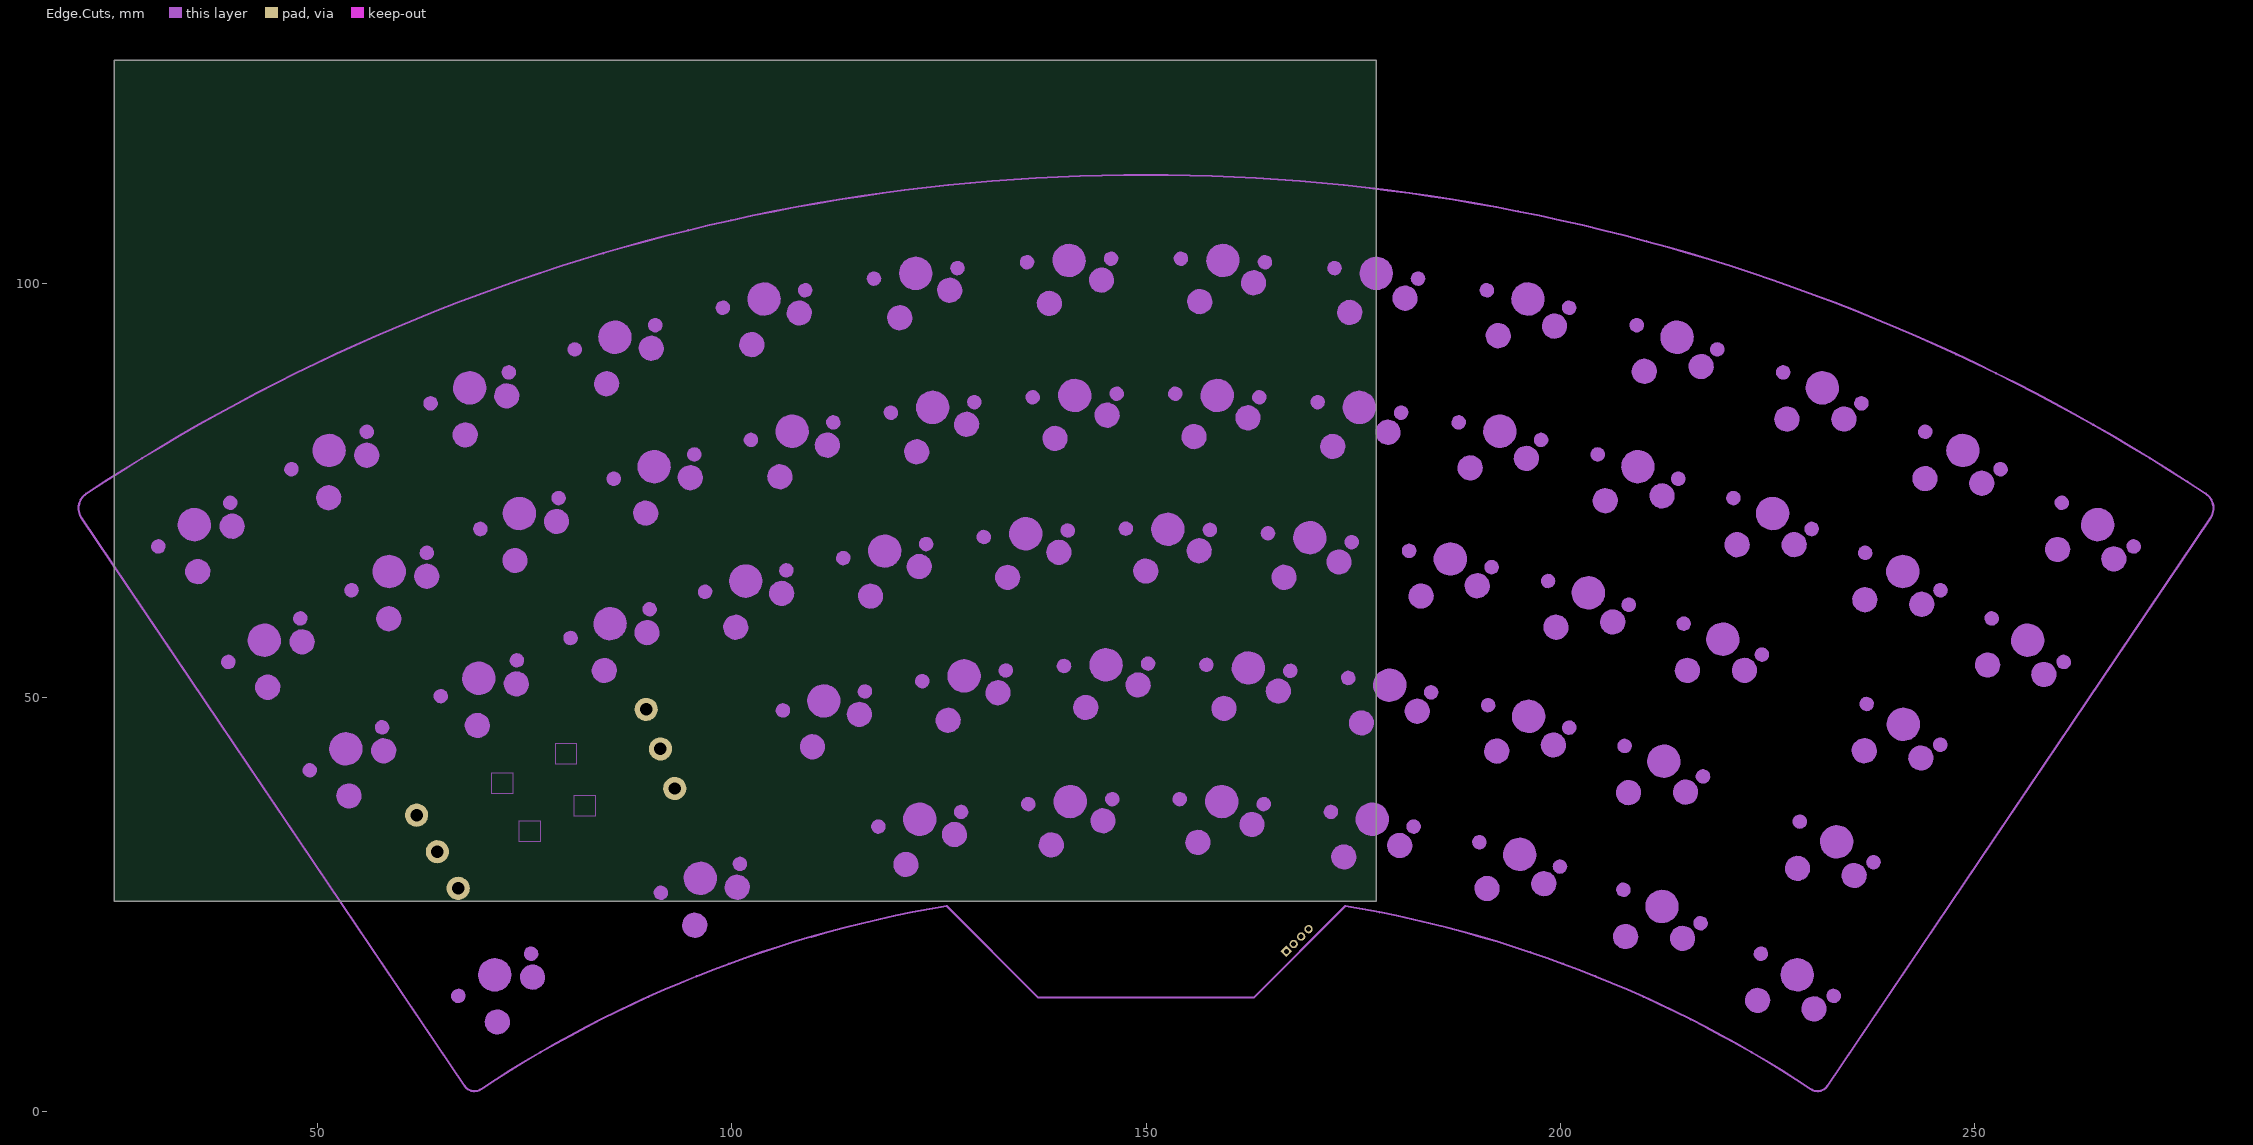
[diagram p12: Edge.Cuts]
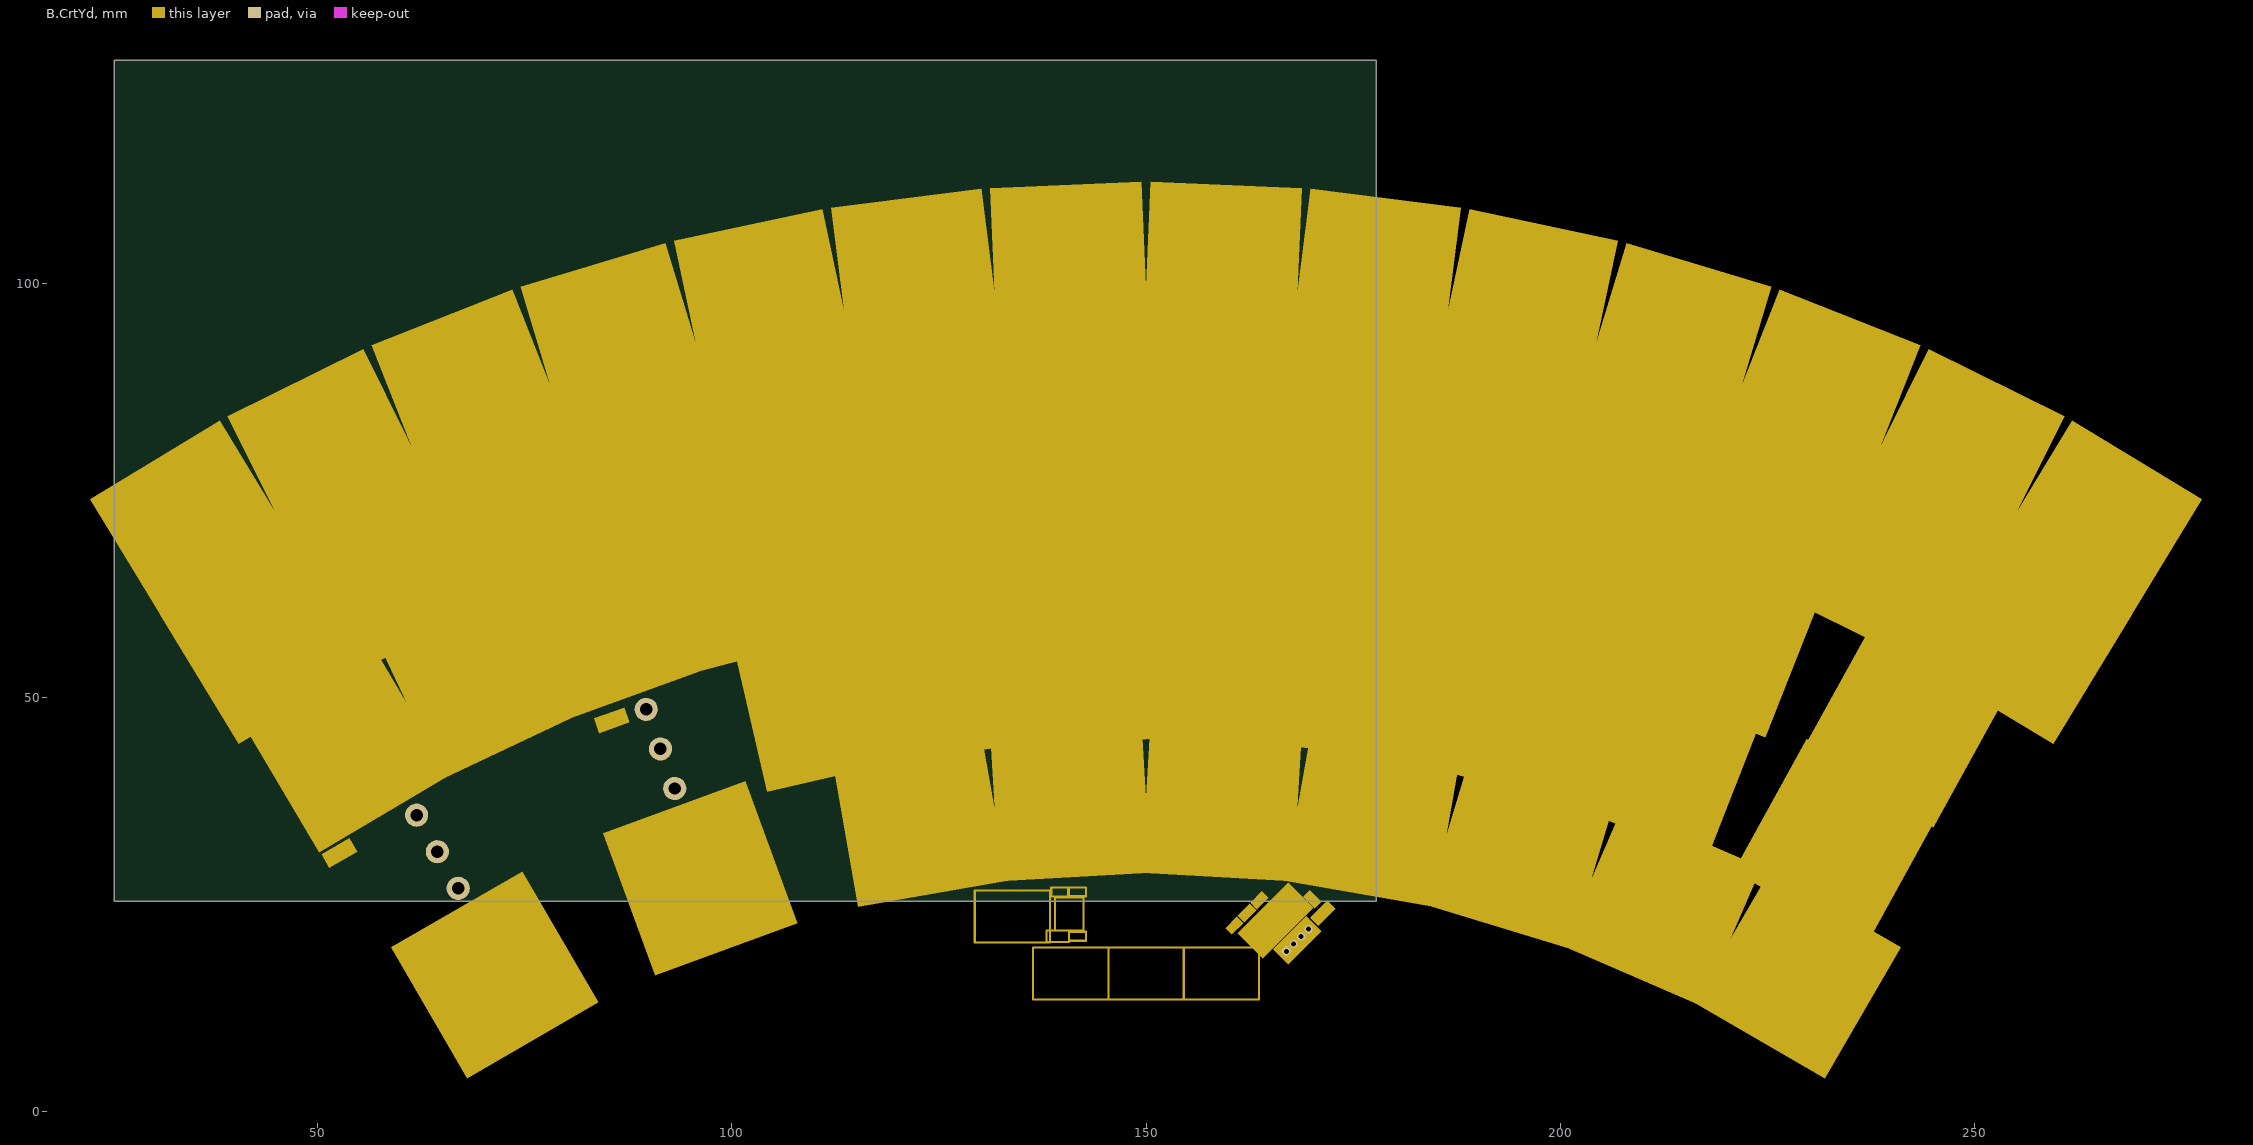
[diagram p13: B.CrtYd]

## Layer stack, top to bottom
Top Solder: solder mask 0.0102, Solder Resist, Dk 3.5
F.Cu: signal copper 0.0356
Dielectric 1: dielectric 0.32, FR-4, Dk 4.8
F.Mask: signal copper 0.0356
Dielectric2: dielectric 0.32, FR-4, Dk 4.8
B.Cu: signal copper 0.0356
Dielectric3: dielectric 0.32, FR-4, Dk 4.8
B.Mask: signal copper 0.0356
Dielectric4: dielectric 0.32, FR-4, Dk 4.8
In1.Cu: signal copper 0.0356
Dielectric5: dielectric 0.32, FR-4, Dk 4.8
F.SilkS: signal copper 0.0356
Dielectric6: dielectric 0.32, FR-4, Dk 4.8
In2.Cu: signal copper 0.0356
Dielectric7: dielectric 0.32, FR-4, Dk 4.8
B.SilkS: signal copper 0.0356
Dielectric8: dielectric 0.32, FR-4, Dk 4.8
F.Adhes: signal copper 0.0356
Dielectric9: dielectric 0.32, FR-4, Dk 4.8
B.Adhes: signal copper 0.0356
Dielectric10: dielectric 0.32, FR-4, Dk 4.8
F.Paste: signal copper 0.0356
Dielectric11: dielectric 0.32, FR-4, Dk 4.8
B.Paste: signal copper 0.0356
Dielectric12: dielectric 0.32, FR-4, Dk 4.8
Dwgs.User: signal copper 0.0356
Dielectric13: dielectric 0.32, FR-4, Dk 4.8
Cmts.User: signal copper 0.0356
Dielectric14: dielectric 0.32, FR-4, Dk 4.8
Eco1.User: signal copper 0.0356
Dielectric15: dielectric 0.32, FR-4, Dk 4.8
Eco2.User: signal copper 0.0356
Dielectric16: dielectric 0.32, FR-4, Dk 4.8
Edge.Cuts: signal copper 0.0356
Dielectric17: dielectric 0.32, FR-4, Dk 4.8
Margin: signal copper 0.0356
Dielectric18: dielectric 0.32, FR-4, Dk 4.8
B.CrtYd: signal copper 0.0356
Dielectric19: dielectric 0.32, FR-4, Dk 4.8
F.CrtYd: signal copper 0.0356
Bottom Solder: solder mask 0.0102, Solder Resist, Dk 3.5

## Board outline
25.4,25.4 177.8,25.4 177.8,127 25.4,127

## Design rules (kind name [scope] priority, off if disabled: settings)
Clearance "Clearence 0.2_NetClass" [InNetClass('Default')] p1: gap=0.2 ignorepadtopadclearanceinfootprint=FALSE
Clearance "Clearence 0.1015_Polygon" [InNamedPolygon('F.Cu--1') OR InNamedPolygon('F.Cu--8') OR InNamedPolygon('B.Cu--37') OR InNamedPolygon('B.Cu--125') OR InNamedPolygon('B.Cu--141') OR InNamedPolygon('In1.Cu-') OR InNamedPolygon('In2.Cu--34') OR InNamedPolygon('Edge.Cuts-') OR InNamedPolygon('Edge.Cuts--1') OR InNamedPolygon('Edge.Cuts--2') OR InNamedPolygon('Edge.Cuts--3')] p2: gap=0.102 ignorepadtopadclearanceinfootprint=FALSE
MinimumSolderMaskSliver [All] p1: minsoldermaskwidth=0
PolygonConnect Polygon_Edge.Cuts--3_ConnectDirect [IsNamedPolygon('Edge.Cuts--3') vs IsVia] p1: connectstyle=Direct reliefconductorwidth=0.254 reliefentries=4 polygonreliefangle="90 Angle" airgapwidth=0.254
PolygonConnect Polygon_Edge.Cuts--3_ConnectRelief45 [IsNamedPolygon('Edge.Cuts--3') vs (IsThruPin or IsSMTPin) and (PadShape_AllLayers = 'Round')] p2: connectstyle=Relief reliefconductorwidth=0.5 reliefentries=4 polygonreliefangle="45 Angle" airgapwidth=0.5
PolygonConnect Polygon_Edge.Cuts--3_ConnectRelief90 [IsNamedPolygon('Edge.Cuts--3') vs (IsThruPin or IsSMTPin) and (PadShape_AllLayers <> 'Round')] p3: connectstyle=Relief reliefconductorwidth=0.5 reliefentries=4 polygonreliefangle="90 Angle" airgapwidth=0.5
PolygonConnect Polygon_Edge.Cuts--2_ConnectDirect [IsNamedPolygon('Edge.Cuts--2') vs IsVia] p4: connectstyle=Direct reliefconductorwidth=0.254 reliefentries=4 polygonreliefangle="90 Angle" airgapwidth=0.254
PolygonConnect Polygon_Edge.Cuts--2_ConnectRelief45 [IsNamedPolygon('Edge.Cuts--2') vs (IsThruPin or IsSMTPin) and (PadShape_AllLayers = 'Round')] p5: connectstyle=Relief reliefconductorwidth=0.5 reliefentries=4 polygonreliefangle="45 Angle" airgapwidth=0.5
PolygonConnect Polygon_Edge.Cuts--2_ConnectRelief90 [IsNamedPolygon('Edge.Cuts--2') vs (IsThruPin or IsSMTPin) and (PadShape_AllLayers <> 'Round')] p6: connectstyle=Relief reliefconductorwidth=0.5 reliefentries=4 polygonreliefangle="90 Angle" airgapwidth=0.5
PolygonConnect Polygon_Edge.Cuts--1_ConnectDirect [IsNamedPolygon('Edge.Cuts--1') vs IsVia] p7: connectstyle=Direct reliefconductorwidth=0.254 reliefentries=4 polygonreliefangle="90 Angle" airgapwidth=0.254
PolygonConnect Polygon_Edge.Cuts--1_ConnectRelief45 [IsNamedPolygon('Edge.Cuts--1') vs (IsThruPin or IsSMTPin) and (PadShape_AllLayers = 'Round')] p8: connectstyle=Relief reliefconductorwidth=0.5 reliefentries=4 polygonreliefangle="45 Angle" airgapwidth=0.5
PolygonConnect Polygon_Edge.Cuts--1_ConnectRelief90 [IsNamedPolygon('Edge.Cuts--1') vs (IsThruPin or IsSMTPin) and (PadShape_AllLayers <> 'Round')] p9: connectstyle=Relief reliefconductorwidth=0.5 reliefentries=4 polygonreliefangle="90 Angle" airgapwidth=0.5
PolygonConnect Polygon_Edge.Cuts-_ConnectDirect [IsNamedPolygon('Edge.Cuts-') vs IsVia] p10: connectstyle=Direct reliefconductorwidth=0.254 reliefentries=4 polygonreliefangle="90 Angle" airgapwidth=0.254
PolygonConnect Polygon_Edge.Cuts-_ConnectRelief45 [IsNamedPolygon('Edge.Cuts-') vs (IsThruPin or IsSMTPin) and (PadShape_AllLayers = 'Round')] p11: connectstyle=Relief reliefconductorwidth=0.5 reliefentries=4 polygonreliefangle="45 Angle" airgapwidth=0.5
PolygonConnect Polygon_Edge.Cuts-_ConnectRelief90 [IsNamedPolygon('Edge.Cuts-') vs (IsThruPin or IsSMTPin) and (PadShape_AllLayers <> 'Round')] p12: connectstyle=Relief reliefconductorwidth=0.5 reliefentries=4 polygonreliefangle="90 Angle" airgapwidth=0.5
PolygonConnect Polygon_In2.Cu--118_ConnectDirect [IsNamedPolygon('In2.Cu--118') vs IsVia] p13: connectstyle=Direct reliefconductorwidth=0.254 reliefentries=4 polygonreliefangle="90 Angle" airgapwidth=0.254
PolygonConnect Polygon_In2.Cu--118_ConnectRelief45 [IsNamedPolygon('In2.Cu--118') vs (IsThruPin or IsSMTPin) and (PadShape_AllLayers = 'Round')] p14: connectstyle=Relief reliefconductorwidth=0.254 reliefentries=4 polygonreliefangle="45 Angle" airgapwidth=0.254
PolygonConnect Polygon_In2.Cu--118_ConnectRelief90 [IsNamedPolygon('In2.Cu--118') vs (IsThruPin or IsSMTPin) and (PadShape_AllLayers <> 'Round')] p15: connectstyle=Relief reliefconductorwidth=0.254 reliefentries=4 polygonreliefangle="90 Angle" airgapwidth=0.254
PolygonConnect Polygon_In2.Cu--117_ConnectDirect [IsNamedPolygon('In2.Cu--117') vs IsVia] p16: connectstyle=Direct reliefconductorwidth=0.254 reliefentries=4 polygonreliefangle="90 Angle" airgapwidth=0.254
PolygonConnect Polygon_In2.Cu--117_ConnectRelief45 [IsNamedPolygon('In2.Cu--117') vs (IsThruPin or IsSMTPin) and (PadShape_AllLayers = 'Round')] p17: connectstyle=Relief reliefconductorwidth=0.254 reliefentries=4 polygonreliefangle="45 Angle" airgapwidth=0.254
PolygonConnect Polygon_In2.Cu--117_ConnectRelief90 [IsNamedPolygon('In2.Cu--117') vs (IsThruPin or IsSMTPin) and (PadShape_AllLayers <> 'Round')] p18: connectstyle=Relief reliefconductorwidth=0.254 reliefentries=4 polygonreliefangle="90 Angle" airgapwidth=0.254
PolygonConnect Polygon_In2.Cu--116_ConnectDirect [IsNamedPolygon('In2.Cu--116') vs IsVia] p19: connectstyle=Direct reliefconductorwidth=0.254 reliefentries=4 polygonreliefangle="90 Angle" airgapwidth=0.254
PolygonConnect Polygon_In2.Cu--116_ConnectRelief45 [IsNamedPolygon('In2.Cu--116') vs (IsThruPin or IsSMTPin) and (PadShape_AllLayers = 'Round')] p20: connectstyle=Relief reliefconductorwidth=0.254 reliefentries=4 polygonreliefangle="45 Angle" airgapwidth=0.254
PolygonConnect Polygon_In2.Cu--116_ConnectRelief90 [IsNamedPolygon('In2.Cu--116') vs (IsThruPin or IsSMTPin) and (PadShape_AllLayers <> 'Round')] p21: connectstyle=Relief reliefconductorwidth=0.254 reliefentries=4 polygonreliefangle="90 Angle" airgapwidth=0.254
PolygonConnect Polygon_In2.Cu--115_ConnectDirect [IsNamedPolygon('In2.Cu--115') vs IsVia] p22: connectstyle=Direct reliefconductorwidth=0.254 reliefentries=4 polygonreliefangle="90 Angle" airgapwidth=0.254
PolygonConnect Polygon_In2.Cu--115_ConnectRelief45 [IsNamedPolygon('In2.Cu--115') vs (IsThruPin or IsSMTPin) and (PadShape_AllLayers = 'Round')] p23: connectstyle=Relief reliefconductorwidth=0.254 reliefentries=4 polygonreliefangle="45 Angle" airgapwidth=0.254
PolygonConnect Polygon_In2.Cu--115_ConnectRelief90 [IsNamedPolygon('In2.Cu--115') vs (IsThruPin or IsSMTPin) and (PadShape_AllLayers <> 'Round')] p24: connectstyle=Relief reliefconductorwidth=0.254 reliefentries=4 polygonreliefangle="90 Angle" airgapwidth=0.254
PolygonConnect Polygon_In2.Cu--114_ConnectDirect [IsNamedPolygon('In2.Cu--114') vs IsVia] p25: connectstyle=Direct reliefconductorwidth=0.254 reliefentries=4 polygonreliefangle="90 Angle" airgapwidth=0.254
PolygonConnect Polygon_In2.Cu--114_ConnectRelief45 [IsNamedPolygon('In2.Cu--114') vs (IsThruPin or IsSMTPin) and (PadShape_AllLayers = 'Round')] p26: connectstyle=Relief reliefconductorwidth=0.254 reliefentries=4 polygonreliefangle="45 Angle" airgapwidth=0.254
PolygonConnect Polygon_In2.Cu--114_ConnectRelief90 [IsNamedPolygon('In2.Cu--114') vs (IsThruPin or IsSMTPin) and (PadShape_AllLayers <> 'Round')] p27: connectstyle=Relief reliefconductorwidth=0.254 reliefentries=4 polygonreliefangle="90 Angle" airgapwidth=0.254
PolygonConnect Polygon_In2.Cu--113_ConnectDirect [IsNamedPolygon('In2.Cu--113') vs IsVia] p28: connectstyle=Direct reliefconductorwidth=0.254 reliefentries=4 polygonreliefangle="90 Angle" airgapwidth=0.254
PolygonConnect Polygon_In2.Cu--113_ConnectRelief45 [IsNamedPolygon('In2.Cu--113') vs (IsThruPin or IsSMTPin) and (PadShape_AllLayers = 'Round')] p29: connectstyle=Relief reliefconductorwidth=0.254 reliefentries=4 polygonreliefangle="45 Angle" airgapwidth=0.254
PolygonConnect Polygon_In2.Cu--113_ConnectRelief90 [IsNamedPolygon('In2.Cu--113') vs (IsThruPin or IsSMTPin) and (PadShape_AllLayers <> 'Round')] p30: connectstyle=Relief reliefconductorwidth=0.254 reliefentries=4 polygonreliefangle="90 Angle" airgapwidth=0.254
PolygonConnect Polygon_In2.Cu--112_ConnectDirect [IsNamedPolygon('In2.Cu--112') vs IsVia] p31: connectstyle=Direct reliefconductorwidth=0.254 reliefentries=4 polygonreliefangle="90 Angle" airgapwidth=0.254
PolygonConnect Polygon_In2.Cu--112_ConnectRelief45 [IsNamedPolygon('In2.Cu--112') vs (IsThruPin or IsSMTPin) and (PadShape_AllLayers = 'Round')] p32: connectstyle=Relief reliefconductorwidth=0.254 reliefentries=4 polygonreliefangle="45 Angle" airgapwidth=0.254
PolygonConnect Polygon_In2.Cu--112_ConnectRelief90 [IsNamedPolygon('In2.Cu--112') vs (IsThruPin or IsSMTPin) and (PadShape_AllLayers <> 'Round')] p33: connectstyle=Relief reliefconductorwidth=0.254 reliefentries=4 polygonreliefangle="90 Angle" airgapwidth=0.254
PolygonConnect Polygon_In2.Cu--111_ConnectDirect [IsNamedPolygon('In2.Cu--111') vs IsVia] p34: connectstyle=Direct reliefconductorwidth=0.254 reliefentries=4 polygonreliefangle="90 Angle" airgapwidth=0.254
PolygonConnect Polygon_In2.Cu--111_ConnectRelief45 [IsNamedPolygon('In2.Cu--111') vs (IsThruPin or IsSMTPin) and (PadShape_AllLayers = 'Round')] p35: connectstyle=Relief reliefconductorwidth=0.254 reliefentries=4 polygonreliefangle="45 Angle" airgapwidth=0.254
PolygonConnect Polygon_In2.Cu--111_ConnectRelief90 [IsNamedPolygon('In2.Cu--111') vs (IsThruPin or IsSMTPin) and (PadShape_AllLayers <> 'Round')] p36: connectstyle=Relief reliefconductorwidth=0.254 reliefentries=4 polygonreliefangle="90 Angle" airgapwidth=0.254
PolygonConnect Polygon_In2.Cu--110_ConnectDirect [IsNamedPolygon('In2.Cu--110') vs IsVia] p37: connectstyle=Direct reliefconductorwidth=0.254 reliefentries=4 polygonreliefangle="90 Angle" airgapwidth=0.254
PolygonConnect Polygon_In2.Cu--110_ConnectRelief45 [IsNamedPolygon('In2.Cu--110') vs (IsThruPin or IsSMTPin) and (PadShape_AllLayers = 'Round')] p38: connectstyle=Relief reliefconductorwidth=0.254 reliefentries=4 polygonreliefangle="45 Angle" airgapwidth=0.254
PolygonConnect Polygon_In2.Cu--110_ConnectRelief90 [IsNamedPolygon('In2.Cu--110') vs (IsThruPin or IsSMTPin) and (PadShape_AllLayers <> 'Round')] p39: connectstyle=Relief reliefconductorwidth=0.254 reliefentries=4 polygonreliefangle="90 Angle" airgapwidth=0.254
PolygonConnect Polygon_In2.Cu--109_ConnectDirect [IsNamedPolygon('In2.Cu--109') vs IsVia] p40: connectstyle=Direct reliefconductorwidth=0.254 reliefentries=4 polygonreliefangle="90 Angle" airgapwidth=0.254
PolygonConnect Polygon_In2.Cu--109_ConnectRelief45 [IsNamedPolygon('In2.Cu--109') vs (IsThruPin or IsSMTPin) and (PadShape_AllLayers = 'Round')] p41: connectstyle=Relief reliefconductorwidth=0.254 reliefentries=4 polygonreliefangle="45 Angle" airgapwidth=0.254
PolygonConnect Polygon_In2.Cu--109_ConnectRelief90 [IsNamedPolygon('In2.Cu--109') vs (IsThruPin or IsSMTPin) and (PadShape_AllLayers <> 'Round')] p42: connectstyle=Relief reliefconductorwidth=0.254 reliefentries=4 polygonreliefangle="90 Angle" airgapwidth=0.254
PolygonConnect Polygon_In2.Cu--108_ConnectDirect [IsNamedPolygon('In2.Cu--108') vs IsVia] p43: connectstyle=Direct reliefconductorwidth=0.254 reliefentries=4 polygonreliefangle="90 Angle" airgapwidth=0.254
PolygonConnect Polygon_In2.Cu--108_ConnectRelief45 [IsNamedPolygon('In2.Cu--108') vs (IsThruPin or IsSMTPin) and (PadShape_AllLayers = 'Round')] p44: connectstyle=Relief reliefconductorwidth=0.254 reliefentries=4 polygonreliefangle="45 Angle" airgapwidth=0.254
PolygonConnect Polygon_In2.Cu--108_ConnectRelief90 [IsNamedPolygon('In2.Cu--108') vs (IsThruPin or IsSMTPin) and (PadShape_AllLayers <> 'Round')] p45: connectstyle=Relief reliefconductorwidth=0.254 reliefentries=4 polygonreliefangle="90 Angle" airgapwidth=0.254
PolygonConnect Polygon_In2.Cu--107_ConnectDirect [IsNamedPolygon('In2.Cu--107') vs IsVia] p46: connectstyle=Direct reliefconductorwidth=0.254 reliefentries=4 polygonreliefangle="90 Angle" airgapwidth=0.254
PolygonConnect Polygon_In2.Cu--107_ConnectRelief45 [IsNamedPolygon('In2.Cu--107') vs (IsThruPin or IsSMTPin) and (PadShape_AllLayers = 'Round')] p47: connectstyle=Relief reliefconductorwidth=0.254 reliefentries=4 polygonreliefangle="45 Angle" airgapwidth=0.254
PolygonConnect Polygon_In2.Cu--107_ConnectRelief90 [IsNamedPolygon('In2.Cu--107') vs (IsThruPin or IsSMTPin) and (PadShape_AllLayers <> 'Round')] p48: connectstyle=Relief reliefconductorwidth=0.254 reliefentries=4 polygonreliefangle="90 Angle" airgapwidth=0.254
PolygonConnect Polygon_In2.Cu--106_ConnectDirect [IsNamedPolygon('In2.Cu--106') vs IsVia] p49: connectstyle=Direct reliefconductorwidth=0.254 reliefentries=4 polygonreliefangle="90 Angle" airgapwidth=0.254
PolygonConnect Polygon_In2.Cu--106_ConnectRelief45 [IsNamedPolygon('In2.Cu--106') vs (IsThruPin or IsSMTPin) and (PadShape_AllLayers = 'Round')] p50: connectstyle=Relief reliefconductorwidth=0.254 reliefentries=4 polygonreliefangle="45 Angle" airgapwidth=0.254
PolygonConnect Polygon_In2.Cu--106_ConnectRelief90 [IsNamedPolygon('In2.Cu--106') vs (IsThruPin or IsSMTPin) and (PadShape_AllLayers <> 'Round')] p51: connectstyle=Relief reliefconductorwidth=0.254 reliefentries=4 polygonreliefangle="90 Angle" airgapwidth=0.254
PolygonConnect Polygon_In2.Cu--105_ConnectDirect [IsNamedPolygon('In2.Cu--105') vs IsVia] p52: connectstyle=Direct reliefconductorwidth=0.254 reliefentries=4 polygonreliefangle="90 Angle" airgapwidth=0.254
PolygonConnect Polygon_In2.Cu--105_ConnectRelief45 [IsNamedPolygon('In2.Cu--105') vs (IsThruPin or IsSMTPin) and (PadShape_AllLayers = 'Round')] p53: connectstyle=Relief reliefconductorwidth=0.254 reliefentries=4 polygonreliefangle="45 Angle" airgapwidth=0.254
PolygonConnect Polygon_In2.Cu--105_ConnectRelief90 [IsNamedPolygon('In2.Cu--105') vs (IsThruPin or IsSMTPin) and (PadShape_AllLayers <> 'Round')] p54: connectstyle=Relief reliefconductorwidth=0.254 reliefentries=4 polygonreliefangle="90 Angle" airgapwidth=0.254
PolygonConnect Polygon_In2.Cu--104_ConnectDirect [IsNamedPolygon('In2.Cu--104') vs IsVia] p55: connectstyle=Direct reliefconductorwidth=0.254 reliefentries=4 polygonreliefangle="90 Angle" airgapwidth=0.254
PolygonConnect Polygon_In2.Cu--104_ConnectRelief45 [IsNamedPolygon('In2.Cu--104') vs (IsThruPin or IsSMTPin) and (PadShape_AllLayers = 'Round')] p56: connectstyle=Relief reliefconductorwidth=0.254 reliefentries=4 polygonreliefangle="45 Angle" airgapwidth=0.254
PolygonConnect Polygon_In2.Cu--104_ConnectRelief90 [IsNamedPolygon('In2.Cu--104') vs (IsThruPin or IsSMTPin) and (PadShape_AllLayers <> 'Round')] p57: connectstyle=Relief reliefconductorwidth=0.254 reliefentries=4 polygonreliefangle="90 Angle" airgapwidth=0.254
PolygonConnect Polygon_In2.Cu--103_ConnectDirect [IsNamedPolygon('In2.Cu--103') vs IsVia] p58: connectstyle=Direct reliefconductorwidth=0.254 reliefentries=4 polygonreliefangle="90 Angle" airgapwidth=0.254
PolygonConnect Polygon_In2.Cu--103_ConnectRelief45 [IsNamedPolygon('In2.Cu--103') vs (IsThruPin or IsSMTPin) and (PadShape_AllLayers = 'Round')] p59: connectstyle=Relief reliefconductorwidth=0.254 reliefentries=4 polygonreliefangle="45 Angle" airgapwidth=0.254
PolygonConnect Polygon_In2.Cu--103_ConnectRelief90 [IsNamedPolygon('In2.Cu--103') vs (IsThruPin or IsSMTPin) and (PadShape_AllLayers <> 'Round')] p60: connectstyle=Relief reliefconductorwidth=0.254 reliefentries=4 polygonreliefangle="90 Angle" airgapwidth=0.254
PolygonConnect Polygon_In2.Cu--102_ConnectDirect [IsNamedPolygon('In2.Cu--102') vs IsVia] p61: connectstyle=Direct reliefconductorwidth=0.254 reliefentries=4 polygonreliefangle="90 Angle" airgapwidth=0.254
PolygonConnect Polygon_In2.Cu--102_ConnectRelief45 [IsNamedPolygon('In2.Cu--102') vs (IsThruPin or IsSMTPin) and (PadShape_AllLayers = 'Round')] p62: connectstyle=Relief reliefconductorwidth=0.254 reliefentries=4 polygonreliefangle="45 Angle" airgapwidth=0.254
PolygonConnect Polygon_In2.Cu--102_ConnectRelief90 [IsNamedPolygon('In2.Cu--102') vs (IsThruPin or IsSMTPin) and (PadShape_AllLayers <> 'Round')] p63: connectstyle=Relief reliefconductorwidth=0.254 reliefentries=4 polygonreliefangle="90 Angle" airgapwidth=0.254
PolygonConnect Polygon_In2.Cu--101_ConnectDirect [IsNamedPolygon('In2.Cu--101') vs IsVia] p64: connectstyle=Direct reliefconductorwidth=0.254 reliefentries=4 polygonreliefangle="90 Angle" airgapwidth=0.254
PolygonConnect Polygon_In2.Cu--101_ConnectRelief45 [IsNamedPolygon('In2.Cu--101') vs (IsThruPin or IsSMTPin) and (PadShape_AllLayers = 'Round')] p65: connectstyle=Relief reliefconductorwidth=0.254 reliefentries=4 polygonreliefangle="45 Angle" airgapwidth=0.254
PolygonConnect Polygon_In2.Cu--101_ConnectRelief90 [IsNamedPolygon('In2.Cu--101') vs (IsThruPin or IsSMTPin) and (PadShape_AllLayers <> 'Round')] p66: connectstyle=Relief reliefconductorwidth=0.254 reliefentries=4 polygonreliefangle="90 Angle" airgapwidth=0.254
PolygonConnect Polygon_In2.Cu--100_ConnectDirect [IsNamedPolygon('In2.Cu--100') vs IsVia] p67: connectstyle=Direct reliefconductorwidth=0.254 reliefentries=4 polygonreliefangle="90 Angle" airgapwidth=0.254
PolygonConnect Polygon_In2.Cu--100_ConnectRelief45 [IsNamedPolygon('In2.Cu--100') vs (IsThruPin or IsSMTPin) and (PadShape_AllLayers = 'Round')] p68: connectstyle=Relief reliefconductorwidth=0.254 reliefentries=4 polygonreliefangle="45 Angle" airgapwidth=0.254
PolygonConnect Polygon_In2.Cu--100_ConnectRelief90 [IsNamedPolygon('In2.Cu--100') vs (IsThruPin or IsSMTPin) and (PadShape_AllLayers <> 'Round')] p69: connectstyle=Relief reliefconductorwidth=0.254 reliefentries=4 polygonreliefangle="90 Angle" airgapwidth=0.254
PolygonConnect Polygon_In2.Cu--99_ConnectDirect [IsNamedPolygon('In2.Cu--99') vs IsVia] p70: connectstyle=Direct reliefconductorwidth=0.254 reliefentries=4 polygonreliefangle="90 Angle" airgapwidth=0.254
PolygonConnect Polygon_In2.Cu--99_ConnectRelief45 [IsNamedPolygon('In2.Cu--99') vs (IsThruPin or IsSMTPin) and (PadShape_AllLayers = 'Round')] p71: connectstyle=Relief reliefconductorwidth=0.254 reliefentries=4 polygonreliefangle="45 Angle" airgapwidth=0.254
PolygonConnect Polygon_In2.Cu--99_ConnectRelief90 [IsNamedPolygon('In2.Cu--99') vs (IsThruPin or IsSMTPin) and (PadShape_AllLayers <> 'Round')] p72: connectstyle=Relief reliefconductorwidth=0.254 reliefentries=4 polygonreliefangle="90 Angle" airgapwidth=0.254
PolygonConnect Polygon_In2.Cu--98_ConnectDirect [IsNamedPolygon('In2.Cu--98') vs IsVia] p73: connectstyle=Direct reliefconductorwidth=0.254 reliefentries=4 polygonreliefangle="90 Angle" airgapwidth=0.254
PolygonConnect Polygon_In2.Cu--98_ConnectRelief45 [IsNamedPolygon('In2.Cu--98') vs (IsThruPin or IsSMTPin) and (PadShape_AllLayers = 'Round')] p74: connectstyle=Relief reliefconductorwidth=0.254 reliefentries=4 polygonreliefangle="45 Angle" airgapwidth=0.254
PolygonConnect Polygon_In2.Cu--98_ConnectRelief90 [IsNamedPolygon('In2.Cu--98') vs (IsThruPin or IsSMTPin) and (PadShape_AllLayers <> 'Round')] p75: connectstyle=Relief reliefconductorwidth=0.254 reliefentries=4 polygonreliefangle="90 Angle" airgapwidth=0.254
PolygonConnect Polygon_In2.Cu--97_ConnectDirect [IsNamedPolygon('In2.Cu--97') vs IsVia] p76: connectstyle=Direct reliefconductorwidth=0.254 reliefentries=4 polygonreliefangle="90 Angle" airgapwidth=0.254
PolygonConnect Polygon_In2.Cu--97_ConnectRelief45 [IsNamedPolygon('In2.Cu--97') vs (IsThruPin or IsSMTPin) and (PadShape_AllLayers = 'Round')] p77: connectstyle=Relief reliefconductorwidth=0.254 reliefentries=4 polygonreliefangle="45 Angle" airgapwidth=0.254
PolygonConnect Polygon_In2.Cu--97_ConnectRelief90 [IsNamedPolygon('In2.Cu--97') vs (IsThruPin or IsSMTPin) and (PadShape_AllLayers <> 'Round')] p78: connectstyle=Relief reliefconductorwidth=0.254 reliefentries=4 polygonreliefangle="90 Angle" airgapwidth=0.254
PolygonConnect Polygon_In2.Cu--96_ConnectDirect [IsNamedPolygon('In2.Cu--96') vs IsVia] p79: connectstyle=Direct reliefconductorwidth=0.254 reliefentries=4 polygonreliefangle="90 Angle" airgapwidth=0.254
PolygonConnect Polygon_In2.Cu--96_ConnectRelief45 [IsNamedPolygon('In2.Cu--96') vs (IsThruPin or IsSMTPin) and (PadShape_AllLayers = 'Round')] p80: connectstyle=Relief reliefconductorwidth=0.254 reliefentries=4 polygonreliefangle="45 Angle" airgapwidth=0.254
PolygonConnect Polygon_In2.Cu--96_ConnectRelief90 [IsNamedPolygon('In2.Cu--96') vs (IsThruPin or IsSMTPin) and (PadShape_AllLayers <> 'Round')] p81: connectstyle=Relief reliefconductorwidth=0.254 reliefentries=4 polygonreliefangle="90 Angle" airgapwidth=0.254
PolygonConnect Polygon_In2.Cu--95_ConnectDirect [IsNamedPolygon('In2.Cu--95') vs IsVia] p82: connectstyle=Direct reliefconductorwidth=0.254 reliefentries=4 polygonreliefangle="90 Angle" airgapwidth=0.254
PolygonConnect Polygon_In2.Cu--95_ConnectRelief45 [IsNamedPolygon('In2.Cu--95') vs (IsThruPin or IsSMTPin) and (PadShape_AllLayers = 'Round')] p83: connectstyle=Relief reliefconductorwidth=0.254 reliefentries=4 polygonreliefangle="45 Angle" airgapwidth=0.254
PolygonConnect Polygon_In2.Cu--95_ConnectRelief90 [IsNamedPolygon('In2.Cu--95') vs (IsThruPin or IsSMTPin) and (PadShape_AllLayers <> 'Round')] p84: connectstyle=Relief reliefconductorwidth=0.254 reliefentries=4 polygonreliefangle="90 Angle" airgapwidth=0.254
PolygonConnect Polygon_In2.Cu--94_ConnectDirect [IsNamedPolygon('In2.Cu--94') vs IsVia] p85: connectstyle=Direct reliefconductorwidth=0.254 reliefentries=4 polygonreliefangle="90 Angle" airgapwidth=0.254
PolygonConnect Polygon_In2.Cu--94_ConnectRelief45 [IsNamedPolygon('In2.Cu--94') vs (IsThruPin or IsSMTPin) and (PadShape_AllLayers = 'Round')] p86: connectstyle=Relief reliefconductorwidth=0.254 reliefentries=4 polygonreliefangle="45 Angle" airgapwidth=0.254
PolygonConnect Polygon_In2.Cu--94_ConnectRelief90 [IsNamedPolygon('In2.Cu--94') vs (IsThruPin or IsSMTPin) and (PadShape_AllLayers <> 'Round')] p87: connectstyle=Relief reliefconductorwidth=0.254 reliefentries=4 polygonreliefangle="90 Angle" airgapwidth=0.254
PolygonConnect Polygon_In2.Cu--93_ConnectDirect [IsNamedPolygon('In2.Cu--93') vs IsVia] p88: connectstyle=Direct reliefconductorwidth=0.254 reliefentries=4 polygonreliefangle="90 Angle" airgapwidth=0.254
PolygonConnect Polygon_In2.Cu--93_ConnectRelief45 [IsNamedPolygon('In2.Cu--93') vs (IsThruPin or IsSMTPin) and (PadShape_AllLayers = 'Round')] p89: connectstyle=Relief reliefconductorwidth=0.254 reliefentries=4 polygonreliefangle="45 Angle" airgapwidth=0.254
PolygonConnect Polygon_In2.Cu--93_ConnectRelief90 [IsNamedPolygon('In2.Cu--93') vs (IsThruPin or IsSMTPin) and (PadShape_AllLayers <> 'Round')] p90: connectstyle=Relief reliefconductorwidth=0.254 reliefentries=4 polygonreliefangle="90 Angle" airgapwidth=0.254
PolygonConnect Polygon_In2.Cu--92_ConnectDirect [IsNamedPolygon('In2.Cu--92') vs IsVia] p91: connectstyle=Direct reliefconductorwidth=0.254 reliefentries=4 polygonreliefangle="90 Angle" airgapwidth=0.254
PolygonConnect Polygon_In2.Cu--92_ConnectRelief45 [IsNamedPolygon('In2.Cu--92') vs (IsThruPin or IsSMTPin) and (PadShape_AllLayers = 'Round')] p92: connectstyle=Relief reliefconductorwidth=0.254 reliefentries=4 polygonreliefangle="45 Angle" airgapwidth=0.254
PolygonConnect Polygon_In2.Cu--92_ConnectRelief90 [IsNamedPolygon('In2.Cu--92') vs (IsThruPin or IsSMTPin) and (PadShape_AllLayers <> 'Round')] p93: connectstyle=Relief reliefconductorwidth=0.254 reliefentries=4 polygonreliefangle="90 Angle" airgapwidth=0.254
PolygonConnect Polygon_In2.Cu--91_ConnectDirect [IsNamedPolygon('In2.Cu--91') vs IsVia] p94: connectstyle=Direct reliefconductorwidth=0.254 reliefentries=4 polygonreliefangle="90 Angle" airgapwidth=0.254
PolygonConnect Polygon_In2.Cu--91_ConnectRelief45 [IsNamedPolygon('In2.Cu--91') vs (IsThruPin or IsSMTPin) and (PadShape_AllLayers = 'Round')] p95: connectstyle=Relief reliefconductorwidth=0.254 reliefentries=4 polygonreliefangle="45 Angle" airgapwidth=0.254
PolygonConnect Polygon_In2.Cu--91_ConnectRelief90 [IsNamedPolygon('In2.Cu--91') vs (IsThruPin or IsSMTPin) and (PadShape_AllLayers <> 'Round')] p96: connectstyle=Relief reliefconductorwidth=0.254 reliefentries=4 polygonreliefangle="90 Angle" airgapwidth=0.254
PolygonConnect Polygon_In2.Cu--90_ConnectDirect [IsNamedPolygon('In2.Cu--90') vs IsVia] p97: connectstyle=Direct reliefconductorwidth=0.254 reliefentries=4 polygonreliefangle="90 Angle" airgapwidth=0.254
PolygonConnect Polygon_In2.Cu--90_ConnectRelief45 [IsNamedPolygon('In2.Cu--90') vs (IsThruPin or IsSMTPin) and (PadShape_AllLayers = 'Round')] p98: connectstyle=Relief reliefconductorwidth=0.254 reliefentries=4 polygonreliefangle="45 Angle" airgapwidth=0.254
PolygonConnect Polygon_In2.Cu--90_ConnectRelief90 [IsNamedPolygon('In2.Cu--90') vs (IsThruPin or IsSMTPin) and (PadShape_AllLayers <> 'Round')] p99: connectstyle=Relief reliefconductorwidth=0.254 reliefentries=4 polygonreliefangle="90 Angle" airgapwidth=0.254
PolygonConnect Polygon_In2.Cu--89_ConnectDirect [IsNamedPolygon('In2.Cu--89') vs IsVia] p100: connectstyle=Direct reliefconductorwidth=0.254 reliefentries=4 polygonreliefangle="90 Angle" airgapwidth=0.254
PolygonConnect Polygon_In2.Cu--89_ConnectRelief45 [IsNamedPolygon('In2.Cu--89') vs (IsThruPin or IsSMTPin) and (PadShape_AllLayers = 'Round')] p101: connectstyle=Relief reliefconductorwidth=0.254 reliefentries=4 polygonreliefangle="45 Angle" airgapwidth=0.254
PolygonConnect Polygon_In2.Cu--89_ConnectRelief90 [IsNamedPolygon('In2.Cu--89') vs (IsThruPin or IsSMTPin) and (PadShape_AllLayers <> 'Round')] p102: connectstyle=Relief reliefconductorwidth=0.254 reliefentries=4 polygonreliefangle="90 Angle" airgapwidth=0.254
PolygonConnect Polygon_In2.Cu--88_ConnectDirect [IsNamedPolygon('In2.Cu--88') vs IsVia] p103: connectstyle=Direct reliefconductorwidth=0.254 reliefentries=4 polygonreliefangle="90 Angle" airgapwidth=0.254
PolygonConnect Polygon_In2.Cu--88_ConnectRelief45 [IsNamedPolygon('In2.Cu--88') vs (IsThruPin or IsSMTPin) and (PadShape_AllLayers = 'Round')] p104: connectstyle=Relief reliefconductorwidth=0.254 reliefentries=4 polygonreliefangle="45 Angle" airgapwidth=0.254
PolygonConnect Polygon_In2.Cu--88_ConnectRelief90 [IsNamedPolygon('In2.Cu--88') vs (IsThruPin or IsSMTPin) and (PadShape_AllLayers <> 'Round')] p105: connectstyle=Relief reliefconductorwidth=0.254 reliefentries=4 polygonreliefangle="90 Angle" airgapwidth=0.254
PolygonConnect Polygon_In2.Cu--87_ConnectDirect [IsNamedPolygon('In2.Cu--87') vs IsVia] p106: connectstyle=Direct reliefconductorwidth=0.254 reliefentries=4 polygonreliefangle="90 Angle" airgapwidth=0.254
PolygonConnect Polygon_In2.Cu--87_ConnectRelief45 [IsNamedPolygon('In2.Cu--87') vs (IsThruPin or IsSMTPin) and (PadShape_AllLayers = 'Round')] p107: connectstyle=Relief reliefconductorwidth=0.254 reliefentries=4 polygonreliefangle="45 Angle" airgapwidth=0.254
PolygonConnect Polygon_In2.Cu--87_ConnectRelief90 [IsNamedPolygon('In2.Cu--87') vs (IsThruPin or IsSMTPin) and (PadShape_AllLayers <> 'Round')] p108: connectstyle=Relief reliefconductorwidth=0.254 reliefentries=4 polygonreliefangle="90 Angle" airgapwidth=0.254
PolygonConnect Polygon_In2.Cu--86_ConnectDirect [IsNamedPolygon('In2.Cu--86') vs IsVia] p109: connectstyle=Direct reliefconductorwidth=0.254 reliefentries=4 polygonreliefangle="90 Angle" airgapwidth=0.254
PolygonConnect Polygon_In2.Cu--86_ConnectRelief45 [IsNamedPolygon('In2.Cu--86') vs (IsThruPin or IsSMTPin) and (PadShape_AllLayers = 'Round')] p110: connectstyle=Relief reliefconductorwidth=0.254 reliefentries=4 polygonreliefangle="45 Angle" airgapwidth=0.254
PolygonConnect Polygon_In2.Cu--86_ConnectRelief90 [IsNamedPolygon('In2.Cu--86') vs (IsThruPin or IsSMTPin) and (PadShape_AllLayers <> 'Round')] p111: connectstyle=Relief reliefconductorwidth=0.254 reliefentries=4 polygonreliefangle="90 Angle" airgapwidth=0.254
PolygonConnect Polygon_In2.Cu--85_ConnectDirect [IsNamedPolygon('In2.Cu--85') vs IsVia] p112: connectstyle=Direct reliefconductorwidth=0.254 reliefentries=4 polygonreliefangle="90 Angle" airgapwidth=0.254
PolygonConnect Polygon_In2.Cu--85_ConnectRelief45 [IsNamedPolygon('In2.Cu--85') vs (IsThruPin or IsSMTPin) and (PadShape_AllLayers = 'Round')] p113: connectstyle=Relief reliefconductorwidth=0.254 reliefentries=4 polygonreliefangle="45 Angle" airgapwidth=0.254
PolygonConnect Polygon_In2.Cu--85_ConnectRelief90 [IsNamedPolygon('In2.Cu--85') vs (IsThruPin or IsSMTPin) and (PadShape_AllLayers <> 'Round')] p114: connectstyle=Relief reliefconductorwidth=0.254 reliefentries=4 polygonreliefangle="90 Angle" airgapwidth=0.254
PolygonConnect Polygon_In2.Cu--84_ConnectDirect [IsNamedPolygon('In2.Cu--84') vs IsVia] p115: connectstyle=Direct reliefconductorwidth=0.254 reliefentries=4 polygonreliefangle="90 Angle" airgapwidth=0.254
PolygonConnect Polygon_In2.Cu--84_ConnectRelief45 [IsNamedPolygon('In2.Cu--84') vs (IsThruPin or IsSMTPin) and (PadShape_AllLayers = 'Round')] p116: connectstyle=Relief reliefconductorwidth=0.254 reliefentries=4 polygonreliefangle="45 Angle" airgapwidth=0.254
PolygonConnect Polygon_In2.Cu--84_ConnectRelief90 [IsNamedPolygon('In2.Cu--84') vs (IsThruPin or IsSMTPin) and (PadShape_AllLayers <> 'Round')] p117: connectstyle=Relief reliefconductorwidth=0.254 reliefentries=4 polygonreliefangle="90 Angle" airgapwidth=0.254
PolygonConnect Polygon_In2.Cu--83_ConnectDirect [IsNamedPolygon('In2.Cu--83') vs IsVia] p118: connectstyle=Direct reliefconductorwidth=0.254 reliefentries=4 polygonreliefangle="90 Angle" airgapwidth=0.254
PolygonConnect Polygon_In2.Cu--83_ConnectRelief45 [IsNamedPolygon('In2.Cu--83') vs (IsThruPin or IsSMTPin) and (PadShape_AllLayers = 'Round')] p119: connectstyle=Relief reliefconductorwidth=0.254 reliefentries=4 polygonreliefangle="45 Angle" airgapwidth=0.254
PolygonConnect Polygon_In2.Cu--83_ConnectRelief90 [IsNamedPolygon('In2.Cu--83') vs (IsThruPin or IsSMTPin) and (PadShape_AllLayers <> 'Round')] p120: connectstyle=Relief reliefconductorwidth=0.254 reliefentries=4 polygonreliefangle="90 Angle" airgapwidth=0.254
PolygonConnect Polygon_In2.Cu--82_ConnectDirect [IsNamedPolygon('In2.Cu--82') vs IsVia] p121: connectstyle=Direct reliefconductorwidth=0.254 reliefentries=4 polygonreliefangle="90 Angle" airgapwidth=0.254
PolygonConnect Polygon_In2.Cu--82_ConnectRelief45 [IsNamedPolygon('In2.Cu--82') vs (IsThruPin or IsSMTPin) and (PadShape_AllLayers = 'Round')] p122: connectstyle=Relief reliefconductorwidth=0.254 reliefentries=4 polygonreliefangle="45 Angle" airgapwidth=0.254
PolygonConnect Polygon_In2.Cu--82_ConnectRelief90 [IsNamedPolygon('In2.Cu--82') vs (IsThruPin or IsSMTPin) and (PadShape_AllLayers <> 'Round')] p123: connectstyle=Relief reliefconductorwidth=0.254 reliefentries=4 polygonreliefangle="90 Angle" airgapwidth=0.254
PolygonConnect Polygon_In2.Cu--81_ConnectDirect [IsNamedPolygon('In2.Cu--81') vs IsVia] p124: connectstyle=Direct reliefconductorwidth=0.254 reliefentries=4 polygonreliefangle="90 Angle" airgapwidth=0.254
PolygonConnect Polygon_In2.Cu--81_ConnectRelief45 [IsNamedPolygon('In2.Cu--81') vs (IsThruPin or IsSMTPin) and (PadShape_AllLayers = 'Round')] p125: connectstyle=Relief reliefconductorwidth=0.254 reliefentries=4 polygonreliefangle="45 Angle" airgapwidth=0.254
PolygonConnect Polygon_In2.Cu--81_ConnectRelief90 [IsNamedPolygon('In2.Cu--81') vs (IsThruPin or IsSMTPin) and (PadShape_AllLayers <> 'Round')] p126: connectstyle=Relief reliefconductorwidth=0.254 reliefentries=4 polygonreliefangle="90 Angle" airgapwidth=0.254
PolygonConnect Polygon_In2.Cu--80_ConnectDirect [IsNamedPolygon('In2.Cu--80') vs IsVia] p127: connectstyle=Direct reliefconductorwidth=0.254 reliefentries=4 polygonreliefangle="90 Angle" airgapwidth=0.254
PolygonConnect Polygon_In2.Cu--80_ConnectRelief45 [IsNamedPolygon('In2.Cu--80') vs (IsThruPin or IsSMTPin) and (PadShape_AllLayers = 'Round')] p128: connectstyle=Relief reliefconductorwidth=0.254 reliefentries=4 polygonreliefangle="45 Angle" airgapwidth=0.254
PolygonConnect Polygon_In2.Cu--80_ConnectRelief90 [IsNamedPolygon('In2.Cu--80') vs (IsThruPin or IsSMTPin) and (PadShape_AllLayers <> 'Round')] p129: connectstyle=Relief reliefconductorwidth=0.254 reliefentries=4 polygonreliefangle="90 Angle" airgapwidth=0.254
PolygonConnect Polygon_In2.Cu--79_ConnectDirect [IsNamedPolygon('In2.Cu--79') vs IsVia] p130: connectstyle=Direct reliefconductorwidth=0.254 reliefentries=4 polygonreliefangle="90 Angle" airgapwidth=0.254
PolygonConnect Polygon_In2.Cu--79_ConnectRelief45 [IsNamedPolygon('In2.Cu--79') vs (IsThruPin or IsSMTPin) and (PadShape_AllLayers = 'Round')] p131: connectstyle=Relief reliefconductorwidth=0.254 reliefentries=4 polygonreliefangle="45 Angle" airgapwidth=0.254
PolygonConnect Polygon_In2.Cu--79_ConnectRelief90 [IsNamedPolygon('In2.Cu--79') vs (IsThruPin or IsSMTPin) and (PadShape_AllLayers <> 'Round')] p132: connectstyle=Relief reliefconductorwidth=0.254 reliefentries=4 polygonreliefangle="90 Angle" airgapwidth=0.254
PolygonConnect Polygon_In2.Cu--78_ConnectDirect [IsNamedPolygon('In2.Cu--78') vs IsVia] p133: connectstyle=Direct reliefconductorwidth=0.254 reliefentries=4 polygonreliefangle="90 Angle" airgapwidth=0.254
PolygonConnect Polygon_In2.Cu--78_ConnectRelief45 [IsNamedPolygon('In2.Cu--78') vs (IsThruPin or IsSMTPin) and (PadShape_AllLayers = 'Round')] p134: connectstyle=Relief reliefconductorwidth=0.254 reliefentries=4 polygonreliefangle="45 Angle" airgapwidth=0.254
PolygonConnect Polygon_In2.Cu--78_ConnectRelief90 [IsNamedPolygon('In2.Cu--78') vs (IsThruPin or IsSMTPin) and (PadShape_AllLayers <> 'Round')] p135: connectstyle=Relief reliefconductorwidth=0.254 reliefentries=4 polygonreliefangle="90 Angle" airgapwidth=0.254
PolygonConnect Polygon_In2.Cu--77_ConnectDirect [IsNamedPolygon('In2.Cu--77') vs IsVia] p136: connectstyle=Direct reliefconductorwidth=0.254 reliefentries=4 polygonreliefangle="90 Angle" airgapwidth=0.254
PolygonConnect Polygon_In2.Cu--77_ConnectRelief45 [IsNamedPolygon('In2.Cu--77') vs (IsThruPin or IsSMTPin) and (PadShape_AllLayers = 'Round')] p137: connectstyle=Relief reliefconductorwidth=0.254 reliefentries=4 polygonreliefangle="45 Angle" airgapwidth=0.254
PolygonConnect Polygon_In2.Cu--77_ConnectRelief90 [IsNamedPolygon('In2.Cu--77') vs (IsThruPin or IsSMTPin) and (PadShape_AllLayers <> 'Round')] p138: connectstyle=Relief reliefconductorwidth=0.254 reliefentries=4 polygonreliefangle="90 Angle" airgapwidth=0.254
PolygonConnect Polygon_In2.Cu--76_ConnectDirect [IsNamedPolygon('In2.Cu--76') vs IsVia] p139: connectstyle=Direct reliefconductorwidth=0.254 reliefentries=4 polygonreliefangle="90 Angle" airgapwidth=0.254
PolygonConnect Polygon_In2.Cu--76_ConnectRelief45 [IsNamedPolygon('In2.Cu--76') vs (IsThruPin or IsSMTPin) and (PadShape_AllLayers = 'Round')] p140: connectstyle=Relief reliefconductorwidth=0.254 reliefentries=4 polygonreliefangle="45 Angle" airgapwidth=0.254
PolygonConnect Polygon_In2.Cu--76_ConnectRelief90 [IsNamedPolygon('In2.Cu--76') vs (IsThruPin or IsSMTPin) and (PadShape_AllLayers <> 'Round')] p141: connectstyle=Relief reliefconductorwidth=0.254 reliefentries=4 polygonreliefangle="90 Angle" airgapwidth=0.254
PolygonConnect Polygon_In2.Cu--75_ConnectDirect [IsNamedPolygon('In2.Cu--75') vs IsVia] p142: connectstyle=Direct reliefconductorwidth=0.254 reliefentries=4 polygonreliefangle="90 Angle" airgapwidth=0.254
PolygonConnect Polygon_In2.Cu--75_ConnectRelief45 [IsNamedPolygon('In2.Cu--75') vs (IsThruPin or IsSMTPin) and (PadShape_AllLayers = 'Round')] p143: connectstyle=Relief reliefconductorwidth=0.254 reliefentries=4 polygonreliefangle="45 Angle" airgapwidth=0.254
PolygonConnect Polygon_In2.Cu--75_ConnectRelief90 [IsNamedPolygon('In2.Cu--75') vs (IsThruPin or IsSMTPin) and (PadShape_AllLayers <> 'Round')] p144: connectstyle=Relief reliefconductorwidth=0.254 reliefentries=4 polygonreliefangle="90 Angle" airgapwidth=0.254
PolygonConnect Polygon_In2.Cu--74_ConnectDirect [IsNamedPolygon('In2.Cu--74') vs IsVia] p145: connectstyle=Direct reliefconductorwidth=0.254 reliefentries=4 polygonreliefangle="90 Angle" airgapwidth=0.254
PolygonConnect Polygon_In2.Cu--74_ConnectRelief45 [IsNamedPolygon('In2.Cu--74') vs (IsThruPin or IsSMTPin) and (PadShape_AllLayers = 'Round')] p146: connectstyle=Relief reliefconductorwidth=0.254 reliefentries=4 polygonreliefangle="45 Angle" airgapwidth=0.254
PolygonConnect Polygon_In2.Cu--74_ConnectRelief90 [IsNamedPolygon('In2.Cu--74') vs (IsThruPin or IsSMTPin) and (PadShape_AllLayers <> 'Round')] p147: connectstyle=Relief reliefconductorwidth=0.254 reliefentries=4 polygonreliefangle="90 Angle" airgapwidth=0.254
PolygonConnect Polygon_In2.Cu--73_ConnectDirect [IsNamedPolygon('In2.Cu--73') vs IsVia] p148: connectstyle=Direct reliefconductorwidth=0.254 reliefentries=4 polygonreliefangle="90 Angle" airgapwidth=0.254
PolygonConnect Polygon_In2.Cu--73_ConnectRelief45 [IsNamedPolygon('In2.Cu--73') vs (IsThruPin or IsSMTPin) and (PadShape_AllLayers = 'Round')] p149: connectstyle=Relief reliefconductorwidth=0.254 reliefentries=4 polygonreliefangle="45 Angle" airgapwidth=0.254
PolygonConnect Polygon_In2.Cu--73_ConnectRelief90 [IsNamedPolygon('In2.Cu--73') vs (IsThruPin or IsSMTPin) and (PadShape_AllLayers <> 'Round')] p150: connectstyle=Relief reliefconductorwidth=0.254 reliefentries=4 polygonreliefangle="90 Angle" airgapwidth=0.254
PolygonConnect Polygon_In2.Cu--72_ConnectDirect [IsNamedPolygon('In2.Cu--72') vs IsVia] p151: connectstyle=Direct reliefconductorwidth=0.254 reliefentries=4 polygonreliefangle="90 Angle" airgapwidth=0.254
PolygonConnect Polygon_In2.Cu--72_ConnectRelief45 [IsNamedPolygon('In2.Cu--72') vs (IsThruPin or IsSMTPin) and (PadShape_AllLayers = 'Round')] p152: connectstyle=Relief reliefconductorwidth=0.254 reliefentries=4 polygonreliefangle="45 Angle" airgapwidth=0.254
PolygonConnect Polygon_In2.Cu--72_ConnectRelief90 [IsNamedPolygon('In2.Cu--72') vs (IsThruPin or IsSMTPin) and (PadShape_AllLayers <> 'Round')] p153: connectstyle=Relief reliefconductorwidth=0.254 reliefentries=4 polygonreliefangle="90 Angle" airgapwidth=0.254
PolygonConnect Polygon_In2.Cu--71_ConnectDirect [IsNamedPolygon('In2.Cu--71') vs IsVia] p154: connectstyle=Direct reliefconductorwidth=0.254 reliefentries=4 polygonreliefangle="90 Angle" airgapwidth=0.254
PolygonConnect Polygon_In2.Cu--71_ConnectRelief45 [IsNamedPolygon('In2.Cu--71') vs (IsThruPin or IsSMTPin) and (PadShape_AllLayers = 'Round')] p155: connectstyle=Relief reliefconductorwidth=0.254 reliefentries=4 polygonreliefangle="45 Angle" airgapwidth=0.254
PolygonConnect Polygon_In2.Cu--71_ConnectRelief90 [IsNamedPolygon('In2.Cu--71') vs (IsThruPin or IsSMTPin) and (PadShape_AllLayers <> 'Round')] p156: connectstyle=Relief reliefconductorwidth=0.254 reliefentries=4 polygonreliefangle="90 Angle" airgapwidth=0.254
PolygonConnect Polygon_In2.Cu--70_ConnectDirect [IsNamedPolygon('In2.Cu--70') vs IsVia] p157: connectstyle=Direct reliefconductorwidth=0.254 reliefentries=4 polygonreliefangle="90 Angle" airgapwidth=0.254
PolygonConnect Polygon_In2.Cu--70_ConnectRelief45 [IsNamedPolygon('In2.Cu--70') vs (IsThruPin or IsSMTPin) and (PadShape_AllLayers = 'Round')] p158: connectstyle=Relief reliefconductorwidth=0.254 reliefentries=4 polygonreliefangle="45 Angle" airgapwidth=0.254
PolygonConnect Polygon_In2.Cu--70_ConnectRelief90 [IsNamedPolygon('In2.Cu--70') vs (IsThruPin or IsSMTPin) and (PadShape_AllLayers <> 'Round')] p159: connectstyle=Relief reliefconductorwidth=0.254 reliefentries=4 polygonreliefangle="90 Angle" airgapwidth=0.254
PolygonConnect Polygon_In2.Cu--69_ConnectDirect [IsNamedPolygon('In2.Cu--69') vs IsVia] p160: connectstyle=Direct reliefconductorwidth=0.254 reliefentries=4 polygonreliefangle="90 Angle" airgapwidth=0.254
PolygonConnect Polygon_In2.Cu--69_ConnectRelief45 [IsNamedPolygon('In2.Cu--69') vs (IsThruPin or IsSMTPin) and (PadShape_AllLayers = 'Round')] p161: connectstyle=Relief reliefconductorwidth=0.254 reliefentries=4 polygonreliefangle="45 Angle" airgapwidth=0.254
PolygonConnect Polygon_In2.Cu--69_ConnectRelief90 [IsNamedPolygon('In2.Cu--69') vs (IsThruPin or IsSMTPin) and (PadShape_AllLayers <> 'Round')] p162: connectstyle=Relief reliefconductorwidth=0.254 reliefentries=4 polygonreliefangle="90 Angle" airgapwidth=0.254
PolygonConnect Polygon_In2.Cu--68_ConnectDirect [IsNamedPolygon('In2.Cu--68') vs IsVia] p163: connectstyle=Direct reliefconductorwidth=0.254 reliefentries=4 polygonreliefangle="90 Angle" airgapwidth=0.254
PolygonConnect Polygon_In2.Cu--68_ConnectRelief45 [IsNamedPolygon('In2.Cu--68') vs (IsThruPin or IsSMTPin) and (PadShape_AllLayers = 'Round')] p164: connectstyle=Relief reliefconductorwidth=0.254 reliefentries=4 polygonreliefangle="45 Angle" airgapwidth=0.254
PolygonConnect Polygon_In2.Cu--68_ConnectRelief90 [IsNamedPolygon('In2.Cu--68') vs (IsThruPin or IsSMTPin) and (PadShape_AllLayers <> 'Round')] p165: connectstyle=Relief reliefconductorwidth=0.254 reliefentries=4 polygonreliefangle="90 Angle" airgapwidth=0.254
PolygonConnect Polygon_In2.Cu--67_ConnectDirect [IsNamedPolygon('In2.Cu--67') vs IsVia] p166: connectstyle=Direct reliefconductorwidth=0.254 reliefentries=4 polygonreliefangle="90 Angle" airgapwidth=0.254
PolygonConnect Polygon_In2.Cu--67_ConnectRelief45 [IsNamedPolygon('In2.Cu--67') vs (IsThruPin or IsSMTPin) and (PadShape_AllLayers = 'Round')] p167: connectstyle=Relief reliefconductorwidth=0.254 reliefentries=4 polygonreliefangle="45 Angle" airgapwidth=0.254
PolygonConnect Polygon_In2.Cu--67_ConnectRelief90 [IsNamedPolygon('In2.Cu--67') vs (IsThruPin or IsSMTPin) and (PadShape_AllLayers <> 'Round')] p168: connectstyle=Relief reliefconductorwidth=0.254 reliefentries=4 polygonreliefangle="90 Angle" airgapwidth=0.254
PolygonConnect Polygon_In2.Cu--66_ConnectDirect [IsNamedPolygon('In2.Cu--66') vs IsVia] p169: connectstyle=Direct reliefconductorwidth=0.254 reliefentries=4 polygonreliefangle="90 Angle" airgapwidth=0.254
PolygonConnect Polygon_In2.Cu--66_ConnectRelief45 [IsNamedPolygon('In2.Cu--66') vs (IsThruPin or IsSMTPin) and (PadShape_AllLayers = 'Round')] p170: connectstyle=Relief reliefconductorwidth=0.254 reliefentries=4 polygonreliefangle="45 Angle" airgapwidth=0.254
PolygonConnect Polygon_In2.Cu--66_ConnectRelief90 [IsNamedPolygon('In2.Cu--66') vs (IsThruPin or IsSMTPin) and (PadShape_AllLayers <> 'Round')] p171: connectstyle=Relief reliefconductorwidth=0.254 reliefentries=4 polygonreliefangle="90 Angle" airgapwidth=0.254
PolygonConnect Polygon_In2.Cu--65_ConnectDirect [IsNamedPolygon('In2.Cu--65') vs IsVia] p172: connectstyle=Direct reliefconductorwidth=0.254 reliefentries=4 polygonreliefangle="90 Angle" airgapwidth=0.254
PolygonConnect Polygon_In2.Cu--65_ConnectRelief45 [IsNamedPolygon('In2.Cu--65') vs (IsThruPin or IsSMTPin) and (PadShape_AllLayers = 'Round')] p173: connectstyle=Relief reliefconductorwidth=0.254 reliefentries=4 polygonreliefangle="45 Angle" airgapwidth=0.254
PolygonConnect Polygon_In2.Cu--65_ConnectRelief90 [IsNamedPolygon('In2.Cu--65') vs (IsThruPin or IsSMTPin) and (PadShape_AllLayers <> 'Round')] p174: connectstyle=Relief reliefconductorwidth=0.254 reliefentries=4 polygonreliefangle="90 Angle" airgapwidth=0.254
PolygonConnect Polygon_In2.Cu--64_ConnectDirect [IsNamedPolygon('In2.Cu--64') vs IsVia] p175: connectstyle=Direct reliefconductorwidth=0.254 reliefentries=4 polygonreliefangle="90 Angle" airgapwidth=0.254
PolygonConnect Polygon_In2.Cu--64_ConnectRelief45 [IsNamedPolygon('In2.Cu--64') vs (IsThruPin or IsSMTPin) and (PadShape_AllLayers = 'Round')] p176: connectstyle=Relief reliefconductorwidth=0.254 reliefentries=4 polygonreliefangle="45 Angle" airgapwidth=0.254
PolygonConnect Polygon_In2.Cu--64_ConnectRelief90 [IsNamedPolygon('In2.Cu--64') vs (IsThruPin or IsSMTPin) and (PadShape_AllLayers <> 'Round')] p177: connectstyle=Relief reliefconductorwidth=0.254 reliefentries=4 polygonreliefangle="90 Angle" airgapwidth=0.254
PolygonConnect Polygon_In2.Cu--63_ConnectDirect [IsNamedPolygon('In2.Cu--63') vs IsVia] p178: connectstyle=Direct reliefconductorwidth=0.254 reliefentries=4 polygonreliefangle="90 Angle" airgapwidth=0.254
PolygonConnect Polygon_In2.Cu--63_ConnectRelief45 [IsNamedPolygon('In2.Cu--63') vs (IsThruPin or IsSMTPin) and (PadShape_AllLayers = 'Round')] p179: connectstyle=Relief reliefconductorwidth=0.254 reliefentries=4 polygonreliefangle="45 Angle" airgapwidth=0.254
PolygonConnect Polygon_In2.Cu--63_ConnectRelief90 [IsNamedPolygon('In2.Cu--63') vs (IsThruPin or IsSMTPin) and (PadShape_AllLayers <> 'Round')] p180: connectstyle=Relief reliefconductorwidth=0.254 reliefentries=4 polygonreliefangle="90 Angle" airgapwidth=0.254
PolygonConnect Polygon_In2.Cu--62_ConnectDirect [IsNamedPolygon('In2.Cu--62') vs IsVia] p181: connectstyle=Direct reliefconductorwidth=0.254 reliefentries=4 polygonreliefangle="90 Angle" airgapwidth=0.254
PolygonConnect Polygon_In2.Cu--62_ConnectRelief45 [IsNamedPolygon('In2.Cu--62') vs (IsThruPin or IsSMTPin) and (PadShape_AllLayers = 'Round')] p182: connectstyle=Relief reliefconductorwidth=0.254 reliefentries=4 polygonreliefangle="45 Angle" airgapwidth=0.254
PolygonConnect Polygon_In2.Cu--62_ConnectRelief90 [IsNamedPolygon('In2.Cu--62') vs (IsThruPin or IsSMTPin) and (PadShape_AllLayers <> 'Round')] p183: connectstyle=Relief reliefconductorwidth=0.254 reliefentries=4 polygonreliefangle="90 Angle" airgapwidth=0.254
PolygonConnect Polygon_In2.Cu--61_ConnectDirect [IsNamedPolygon('In2.Cu--61') vs IsVia] p184: connectstyle=Direct reliefconductorwidth=0.254 reliefentries=4 polygonreliefangle="90 Angle" airgapwidth=0.254
PolygonConnect Polygon_In2.Cu--61_ConnectRelief45 [IsNamedPolygon('In2.Cu--61') vs (IsThruPin or IsSMTPin) and (PadShape_AllLayers = 'Round')] p185: connectstyle=Relief reliefconductorwidth=0.254 reliefentries=4 polygonreliefangle="45 Angle" airgapwidth=0.254
PolygonConnect Polygon_In2.Cu--61_ConnectRelief90 [IsNamedPolygon('In2.Cu--61') vs (IsThruPin or IsSMTPin) and (PadShape_AllLayers <> 'Round')] p186: connectstyle=Relief reliefconductorwidth=0.254 reliefentries=4 polygonreliefangle="90 Angle" airgapwidth=0.254
PolygonConnect Polygon_In2.Cu--60_ConnectDirect [IsNamedPolygon('In2.Cu--60') vs IsVia] p187: connectstyle=Direct reliefconductorwidth=0.254 reliefentries=4 polygonreliefangle="90 Angle" airgapwidth=0.254
PolygonConnect Polygon_In2.Cu--60_ConnectRelief45 [IsNamedPolygon('In2.Cu--60') vs (IsThruPin or IsSMTPin) and (PadShape_AllLayers = 'Round')] p188: connectstyle=Relief reliefconductorwidth=0.254 reliefentries=4 polygonreliefangle="45 Angle" airgapwidth=0.254
PolygonConnect Polygon_In2.Cu--60_ConnectRelief90 [IsNamedPolygon('In2.Cu--60') vs (IsThruPin or IsSMTPin) and (PadShape_AllLayers <> 'Round')] p189: connectstyle=Relief reliefconductorwidth=0.254 reliefentries=4 polygonreliefangle="90 Angle" airgapwidth=0.254
PolygonConnect Polygon_In2.Cu--59_ConnectDirect [IsNamedPolygon('In2.Cu--59') vs IsVia] p190: connectstyle=Direct reliefconductorwidth=0.254 reliefentries=4 polygonreliefangle="90 Angle" airgapwidth=0.254
PolygonConnect Polygon_In2.Cu--59_ConnectRelief45 [IsNamedPolygon('In2.Cu--59') vs (IsThruPin or IsSMTPin) and (PadShape_AllLayers = 'Round')] p191: connectstyle=Relief reliefconductorwidth=0.254 reliefentries=4 polygonreliefangle="45 Angle" airgapwidth=0.254
PolygonConnect Polygon_In2.Cu--59_ConnectRelief90 [IsNamedPolygon('In2.Cu--59') vs (IsThruPin or IsSMTPin) and (PadShape_AllLayers <> 'Round')] p192: connectstyle=Relief reliefconductorwidth=0.254 reliefentries=4 polygonreliefangle="90 Angle" airgapwidth=0.254